# Altium PCB PCB_jaustry3.PcbDoc (part 1 of 2)
Units mm, origin at the board's own origin, x right, y up, seen from the top; angles counter-clockwise.
Board outline 112 x 68.3 mm, 9 copper layers (Top Layer (Sig 1), Ground Plane 1, Signal Layer 2, Power Plane 1, Power Plane 2, Signal Layer 3, Mid-Layer 3, Ground Plane 2, Bottom Layer (Sig 4)), stack 1.963 mm thick; 217 components, 291 nets, 863 pads, 308 vias.
Unrouted connection lines stored in the file: 371.
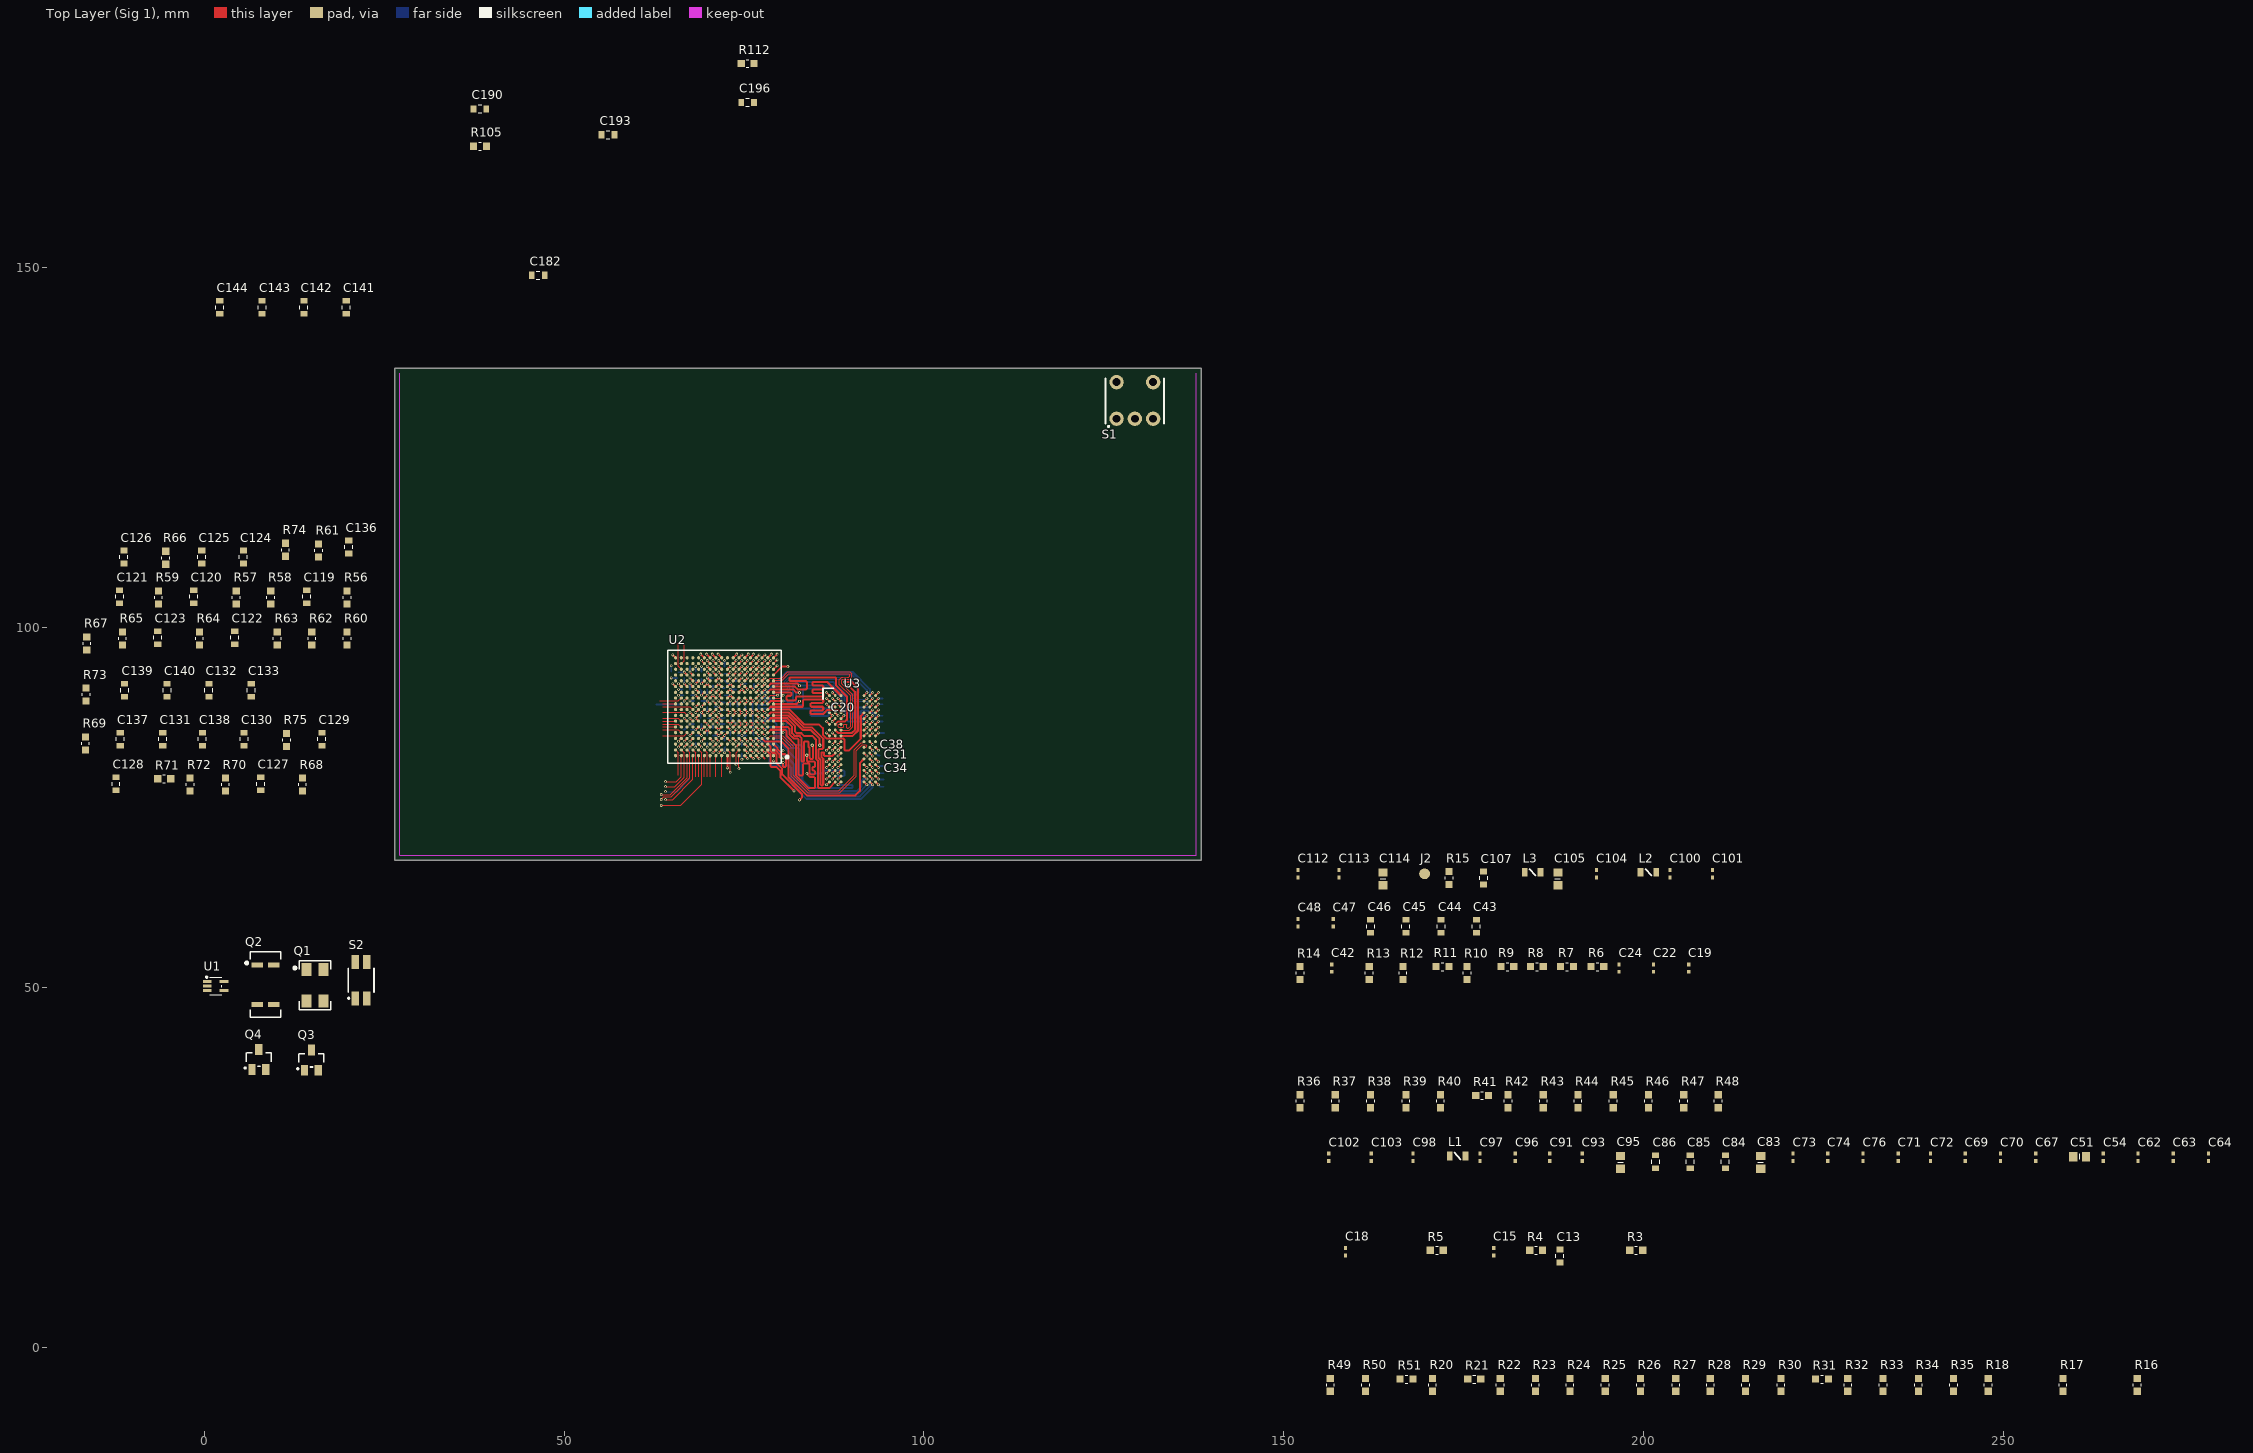
[diagram p0: Top Layer (Sig 1) view]
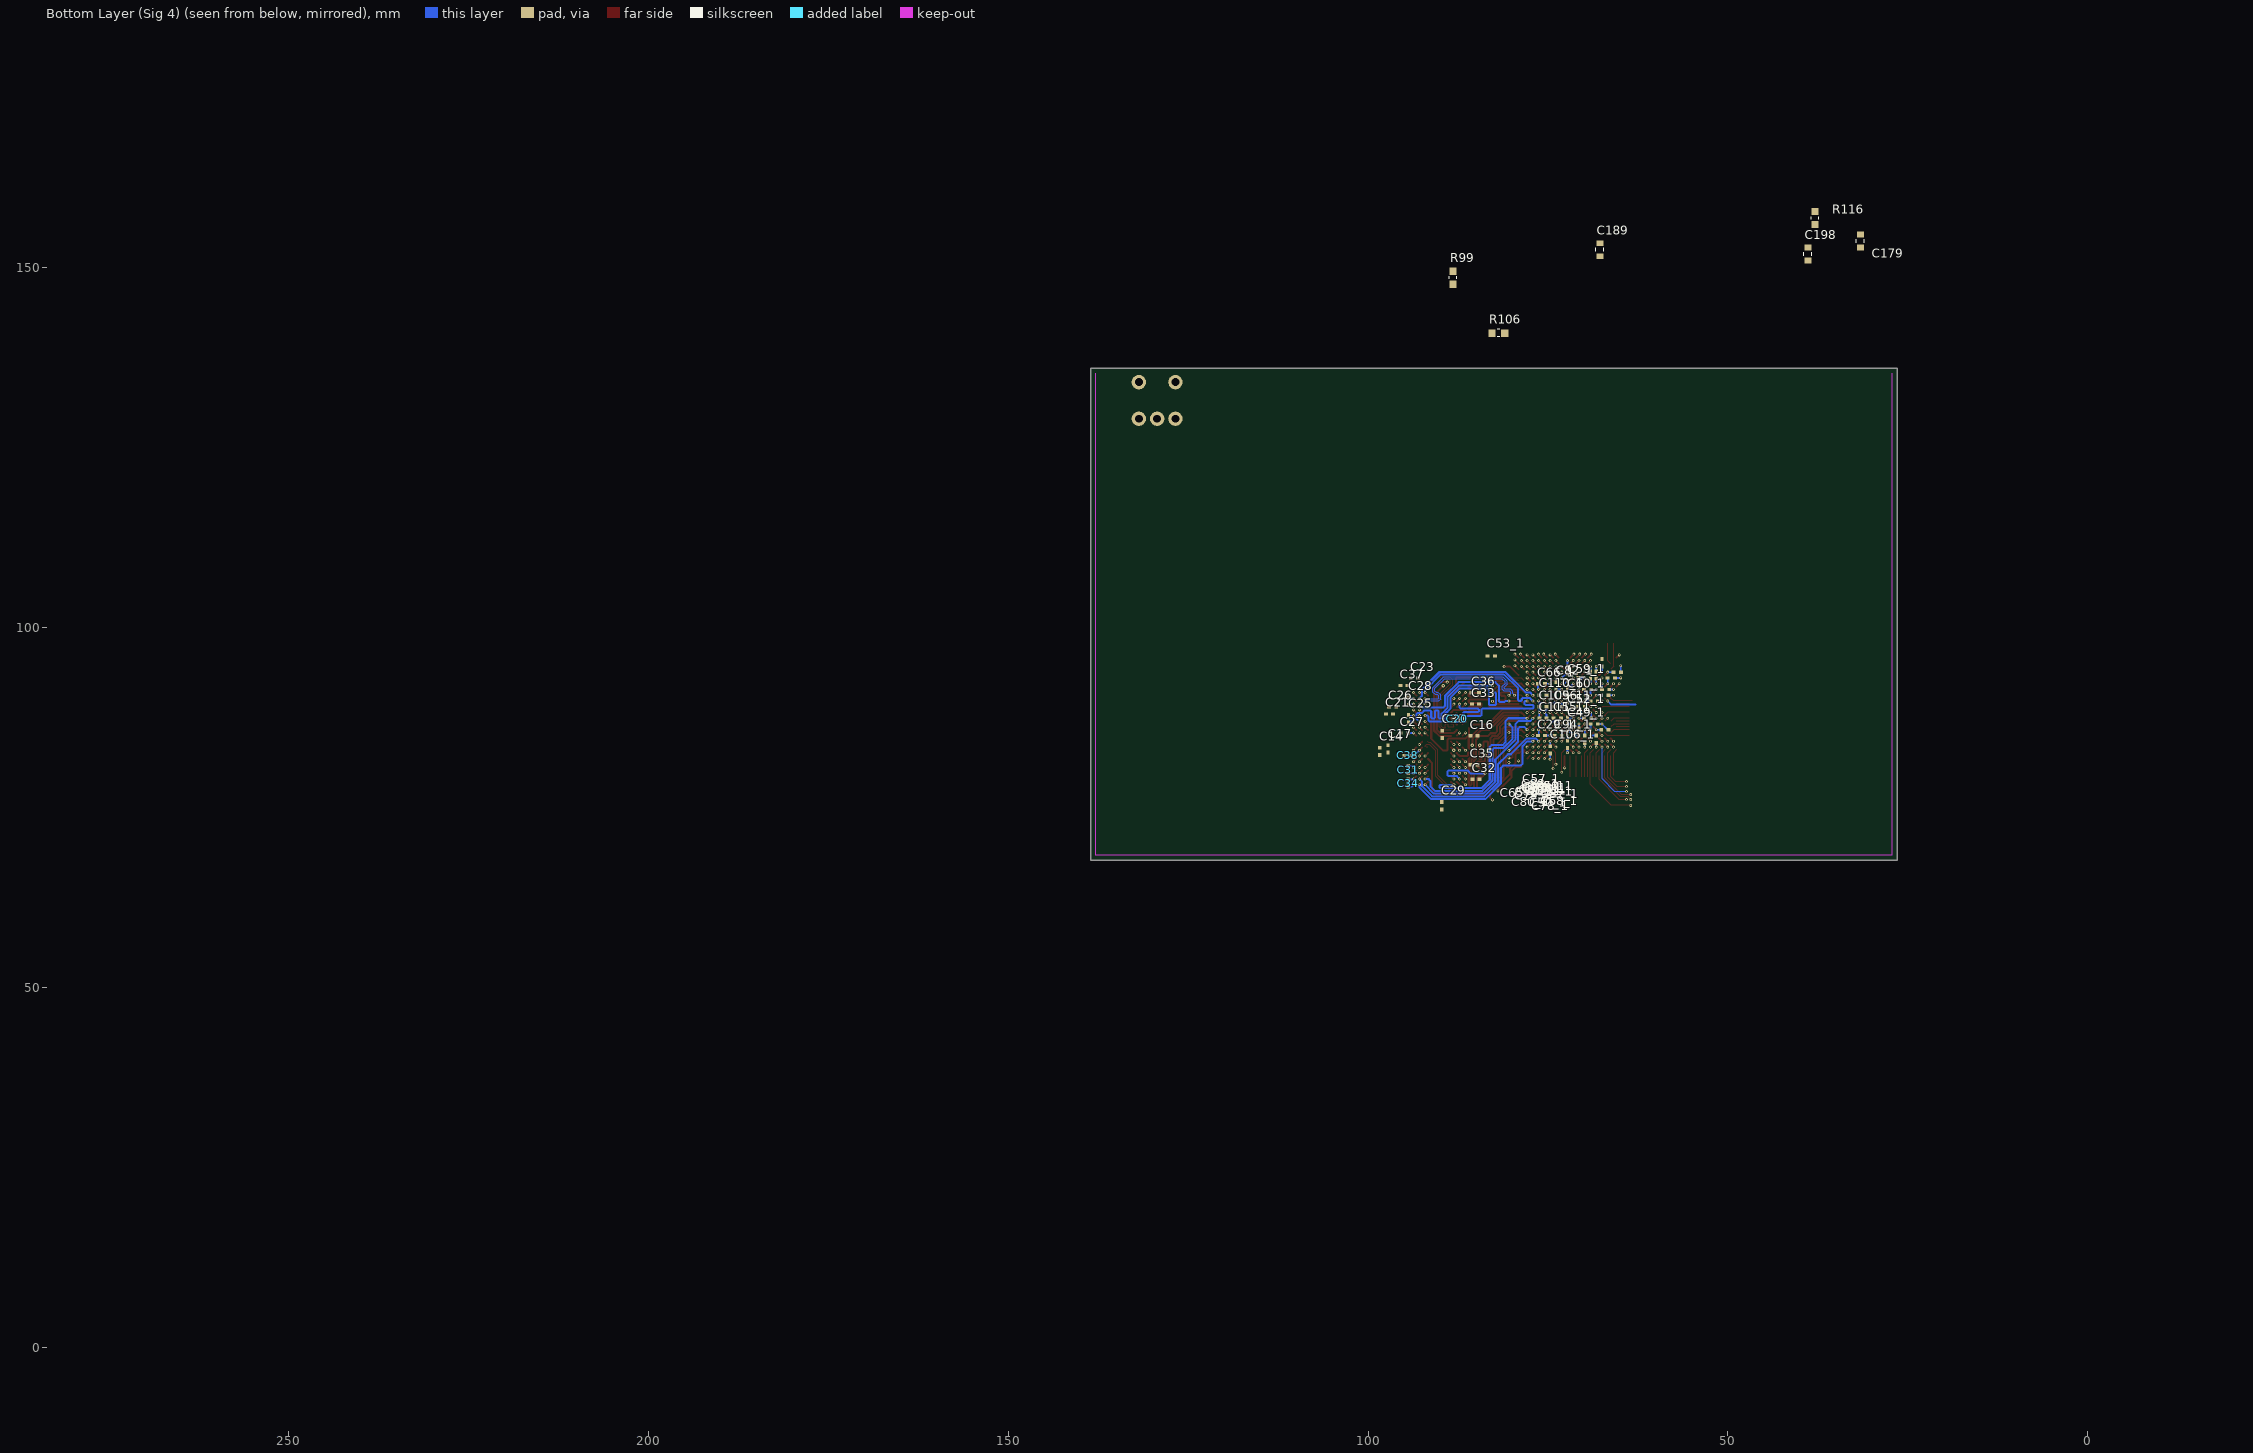
[diagram p1: Bottom Layer (Sig 4) view, seen from below]
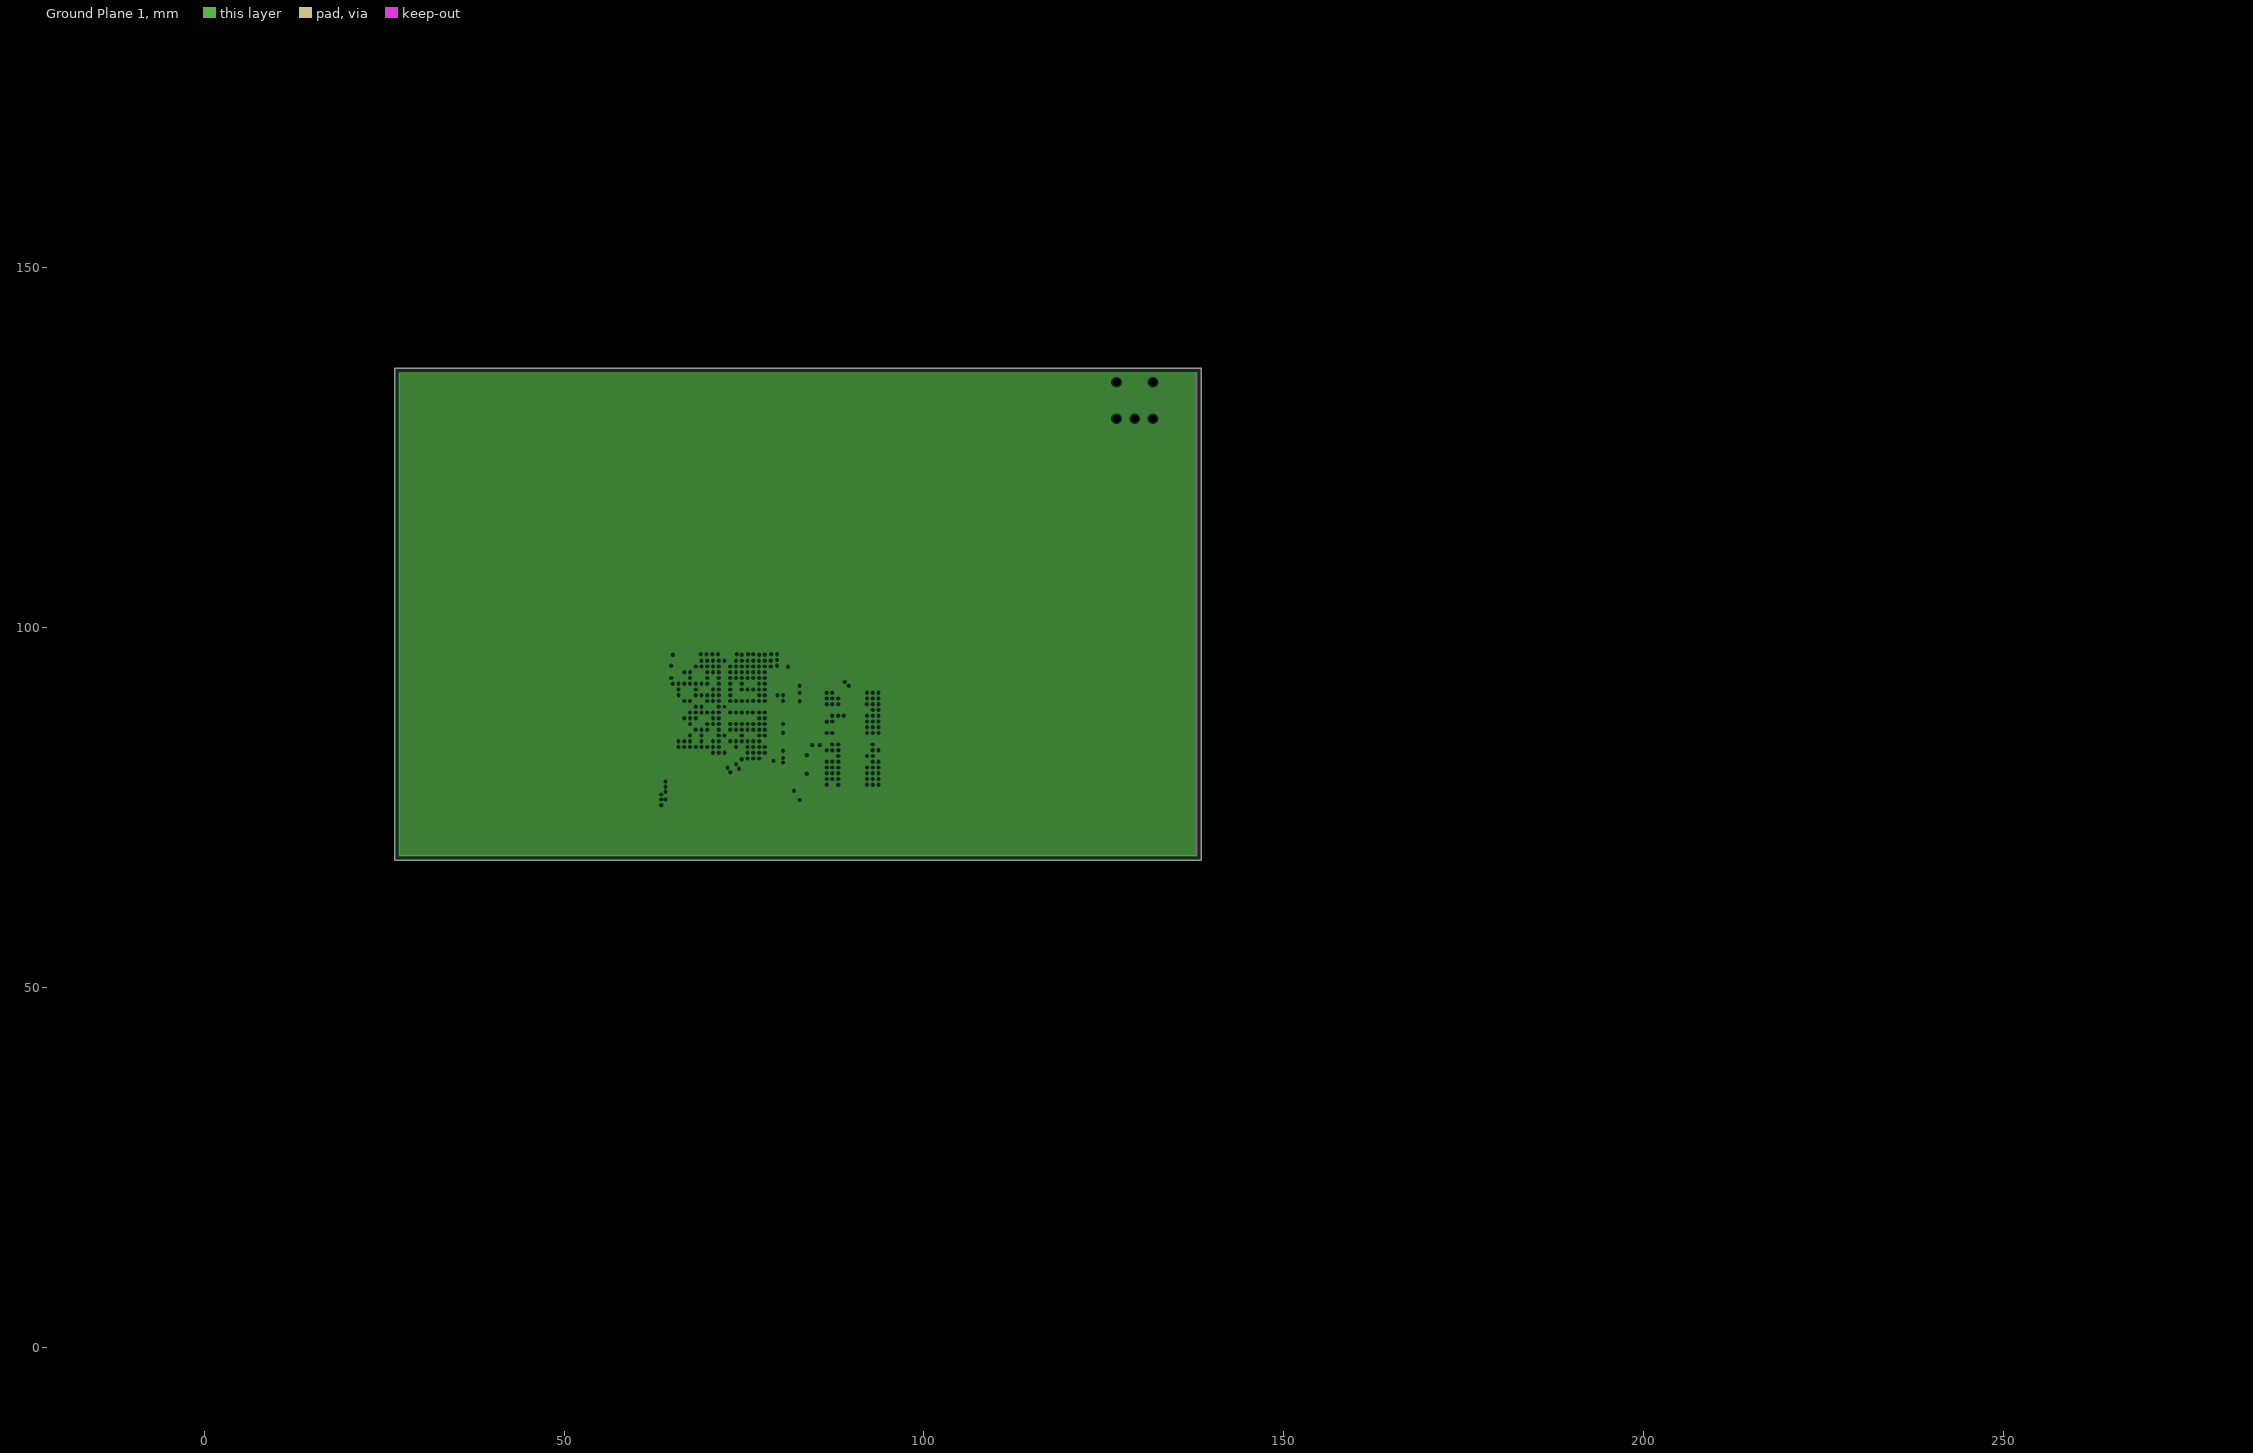
[diagram p2: Ground Plane 1, clearances drawn from the general rule]
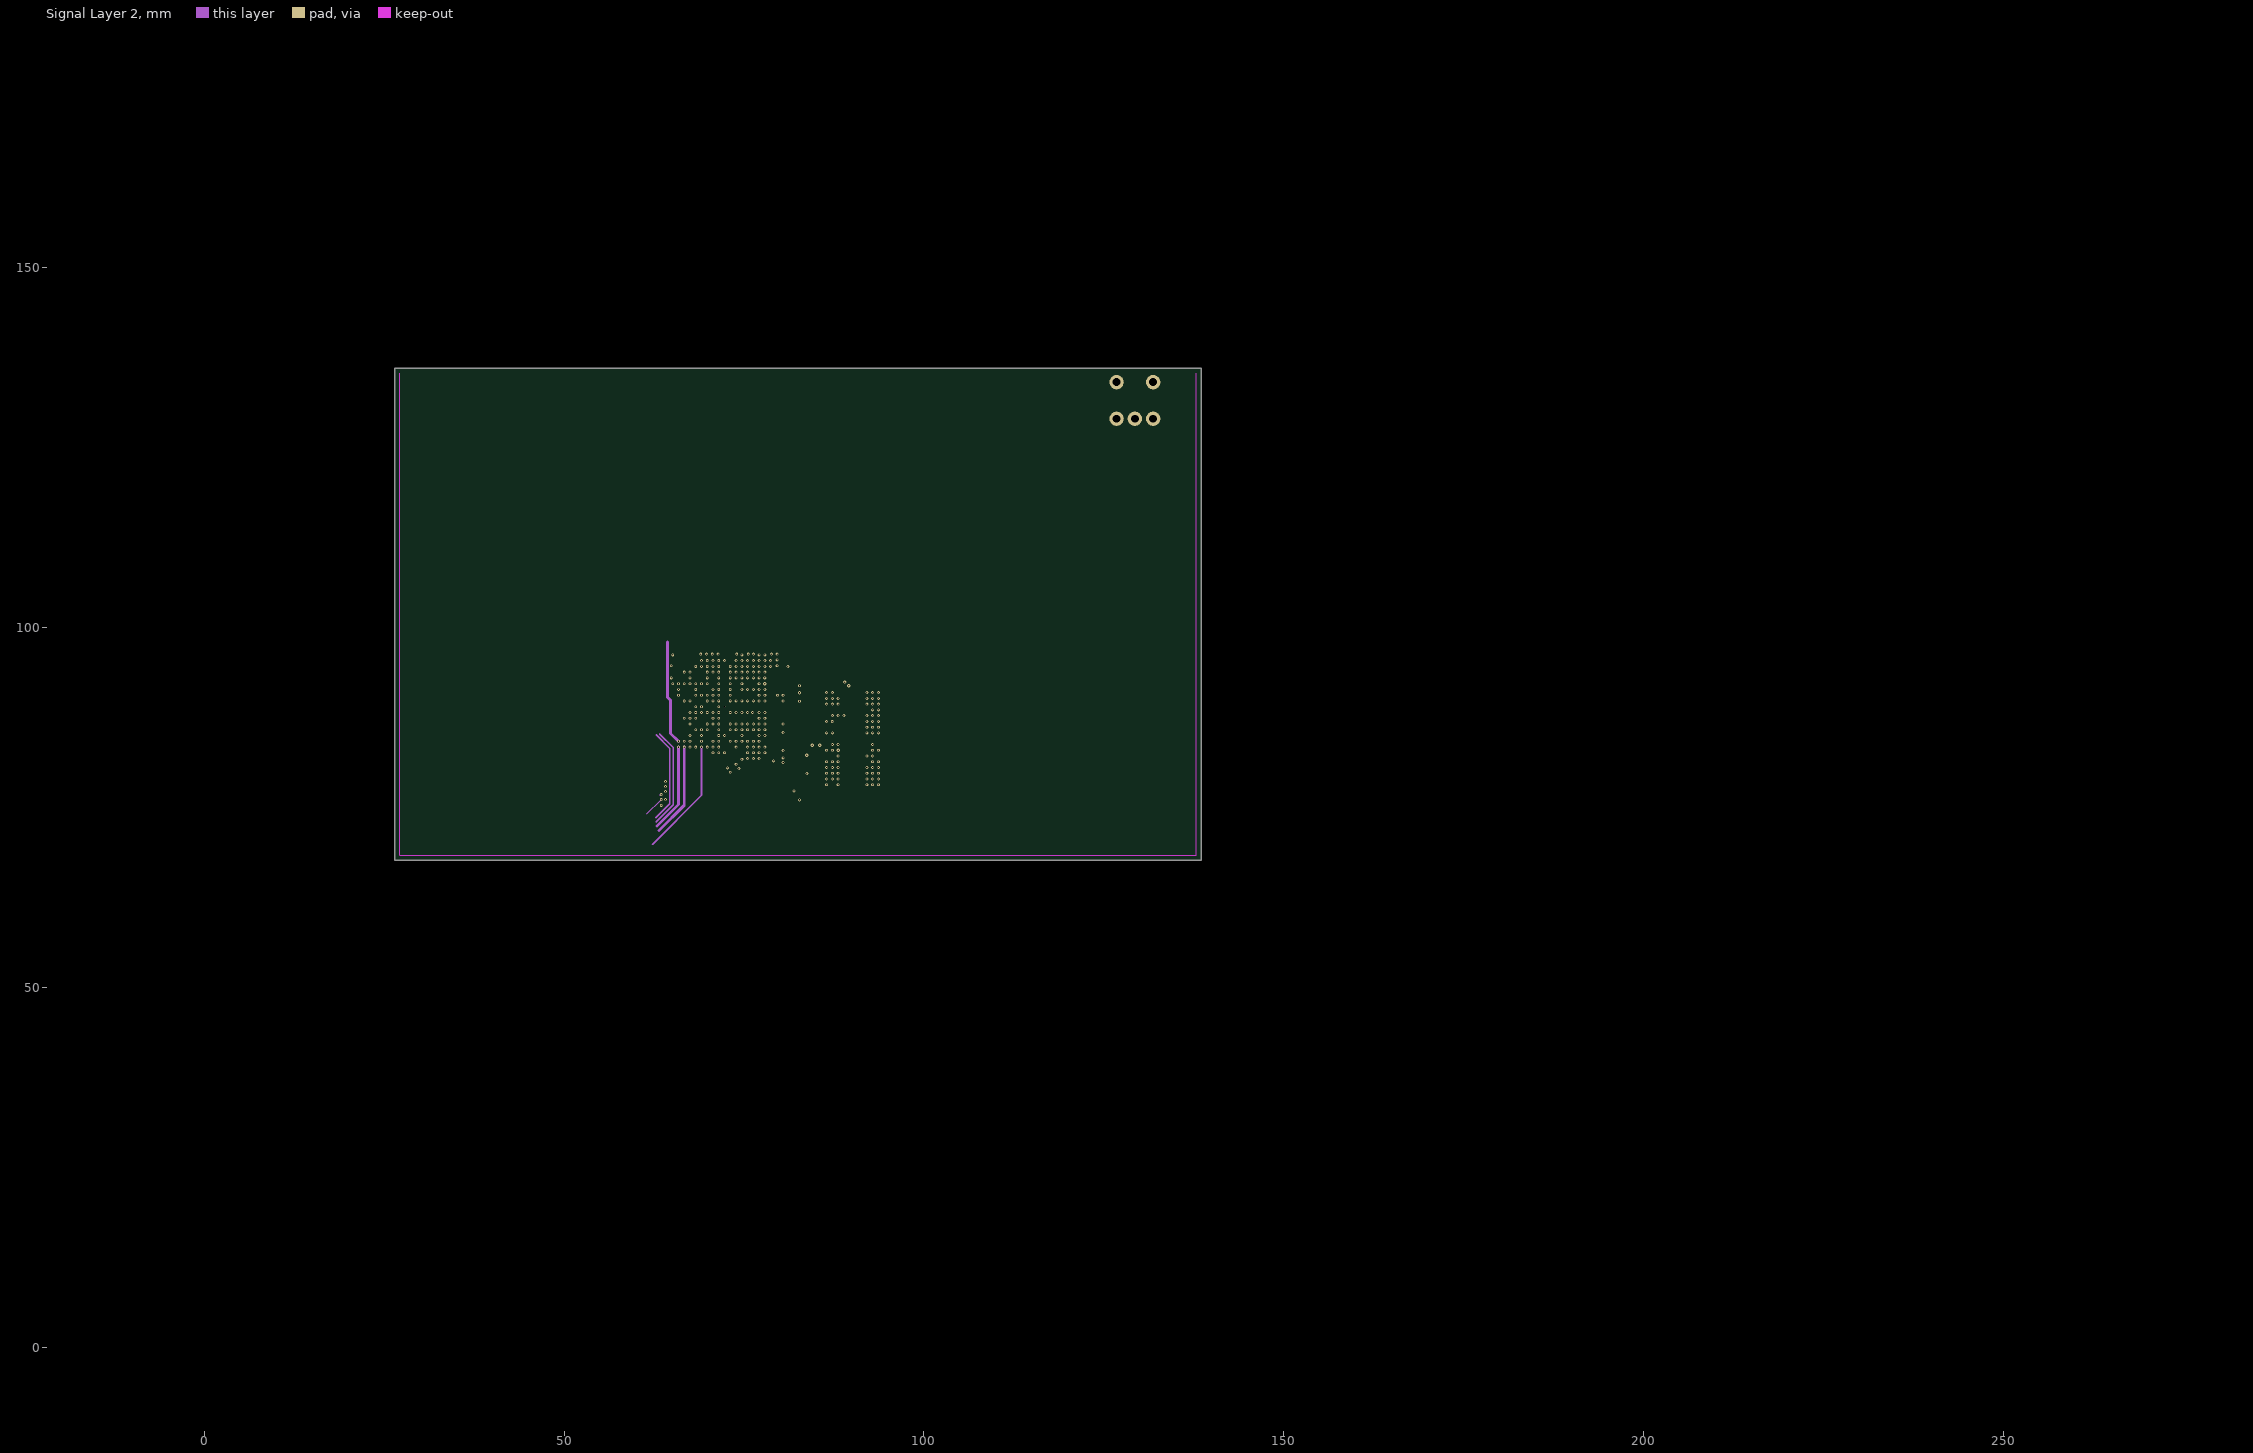
[diagram p3: Signal Layer 2]
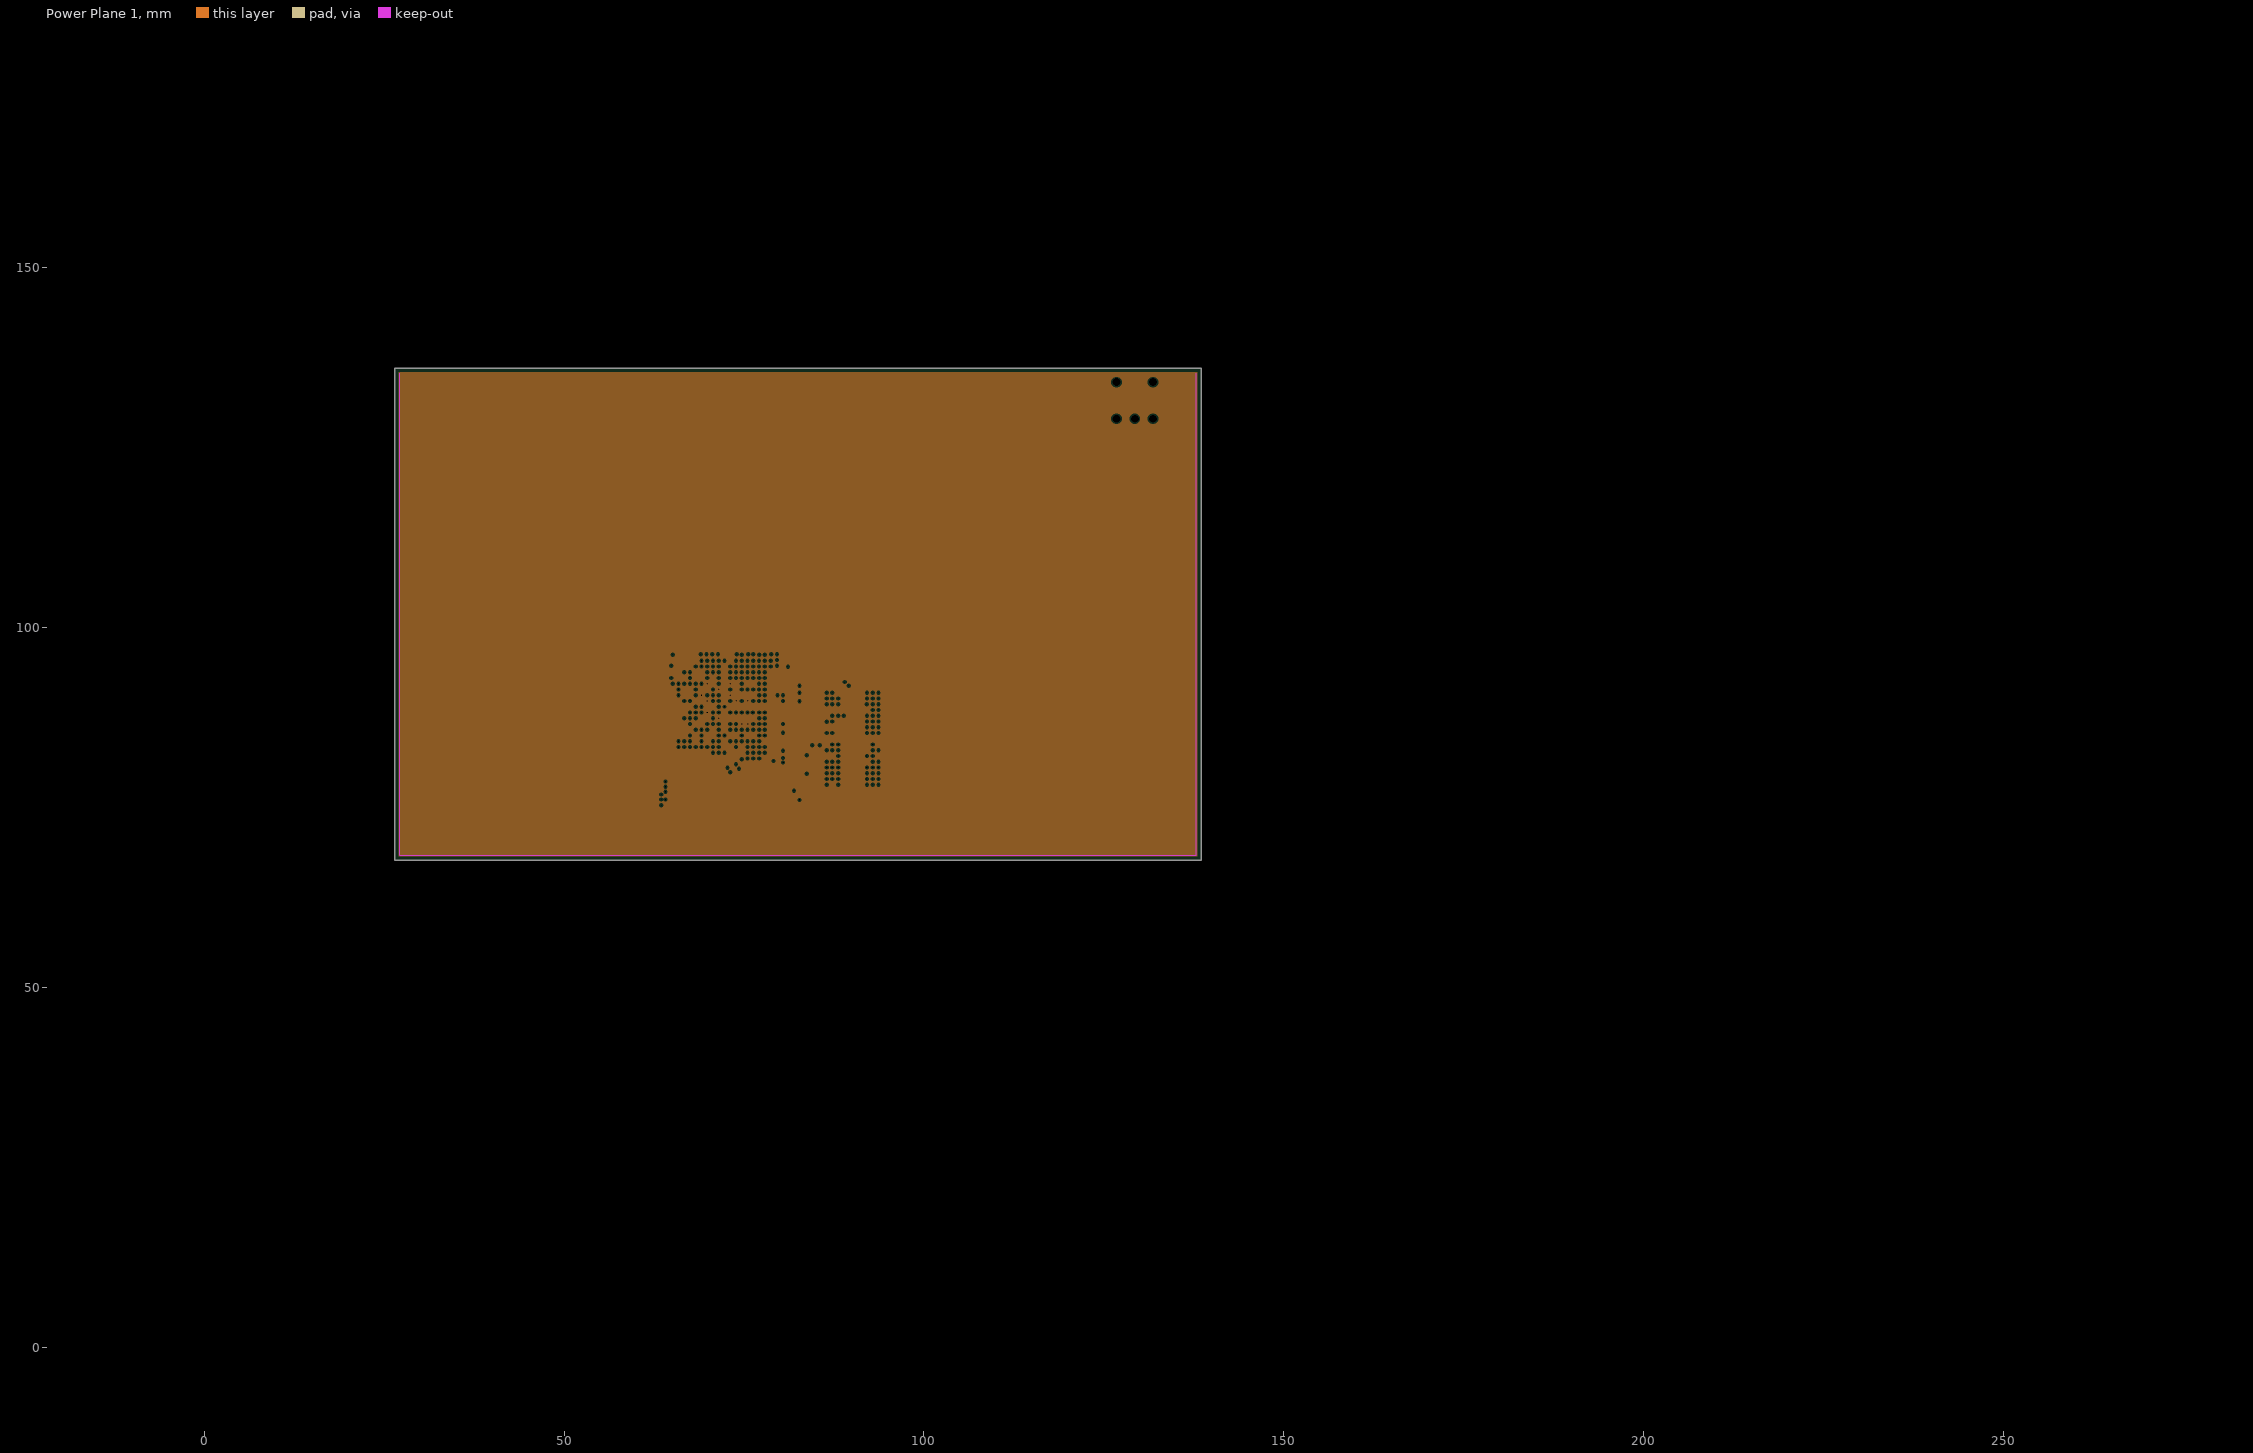
[diagram p4: Power Plane 1, clearances drawn from the general rule]
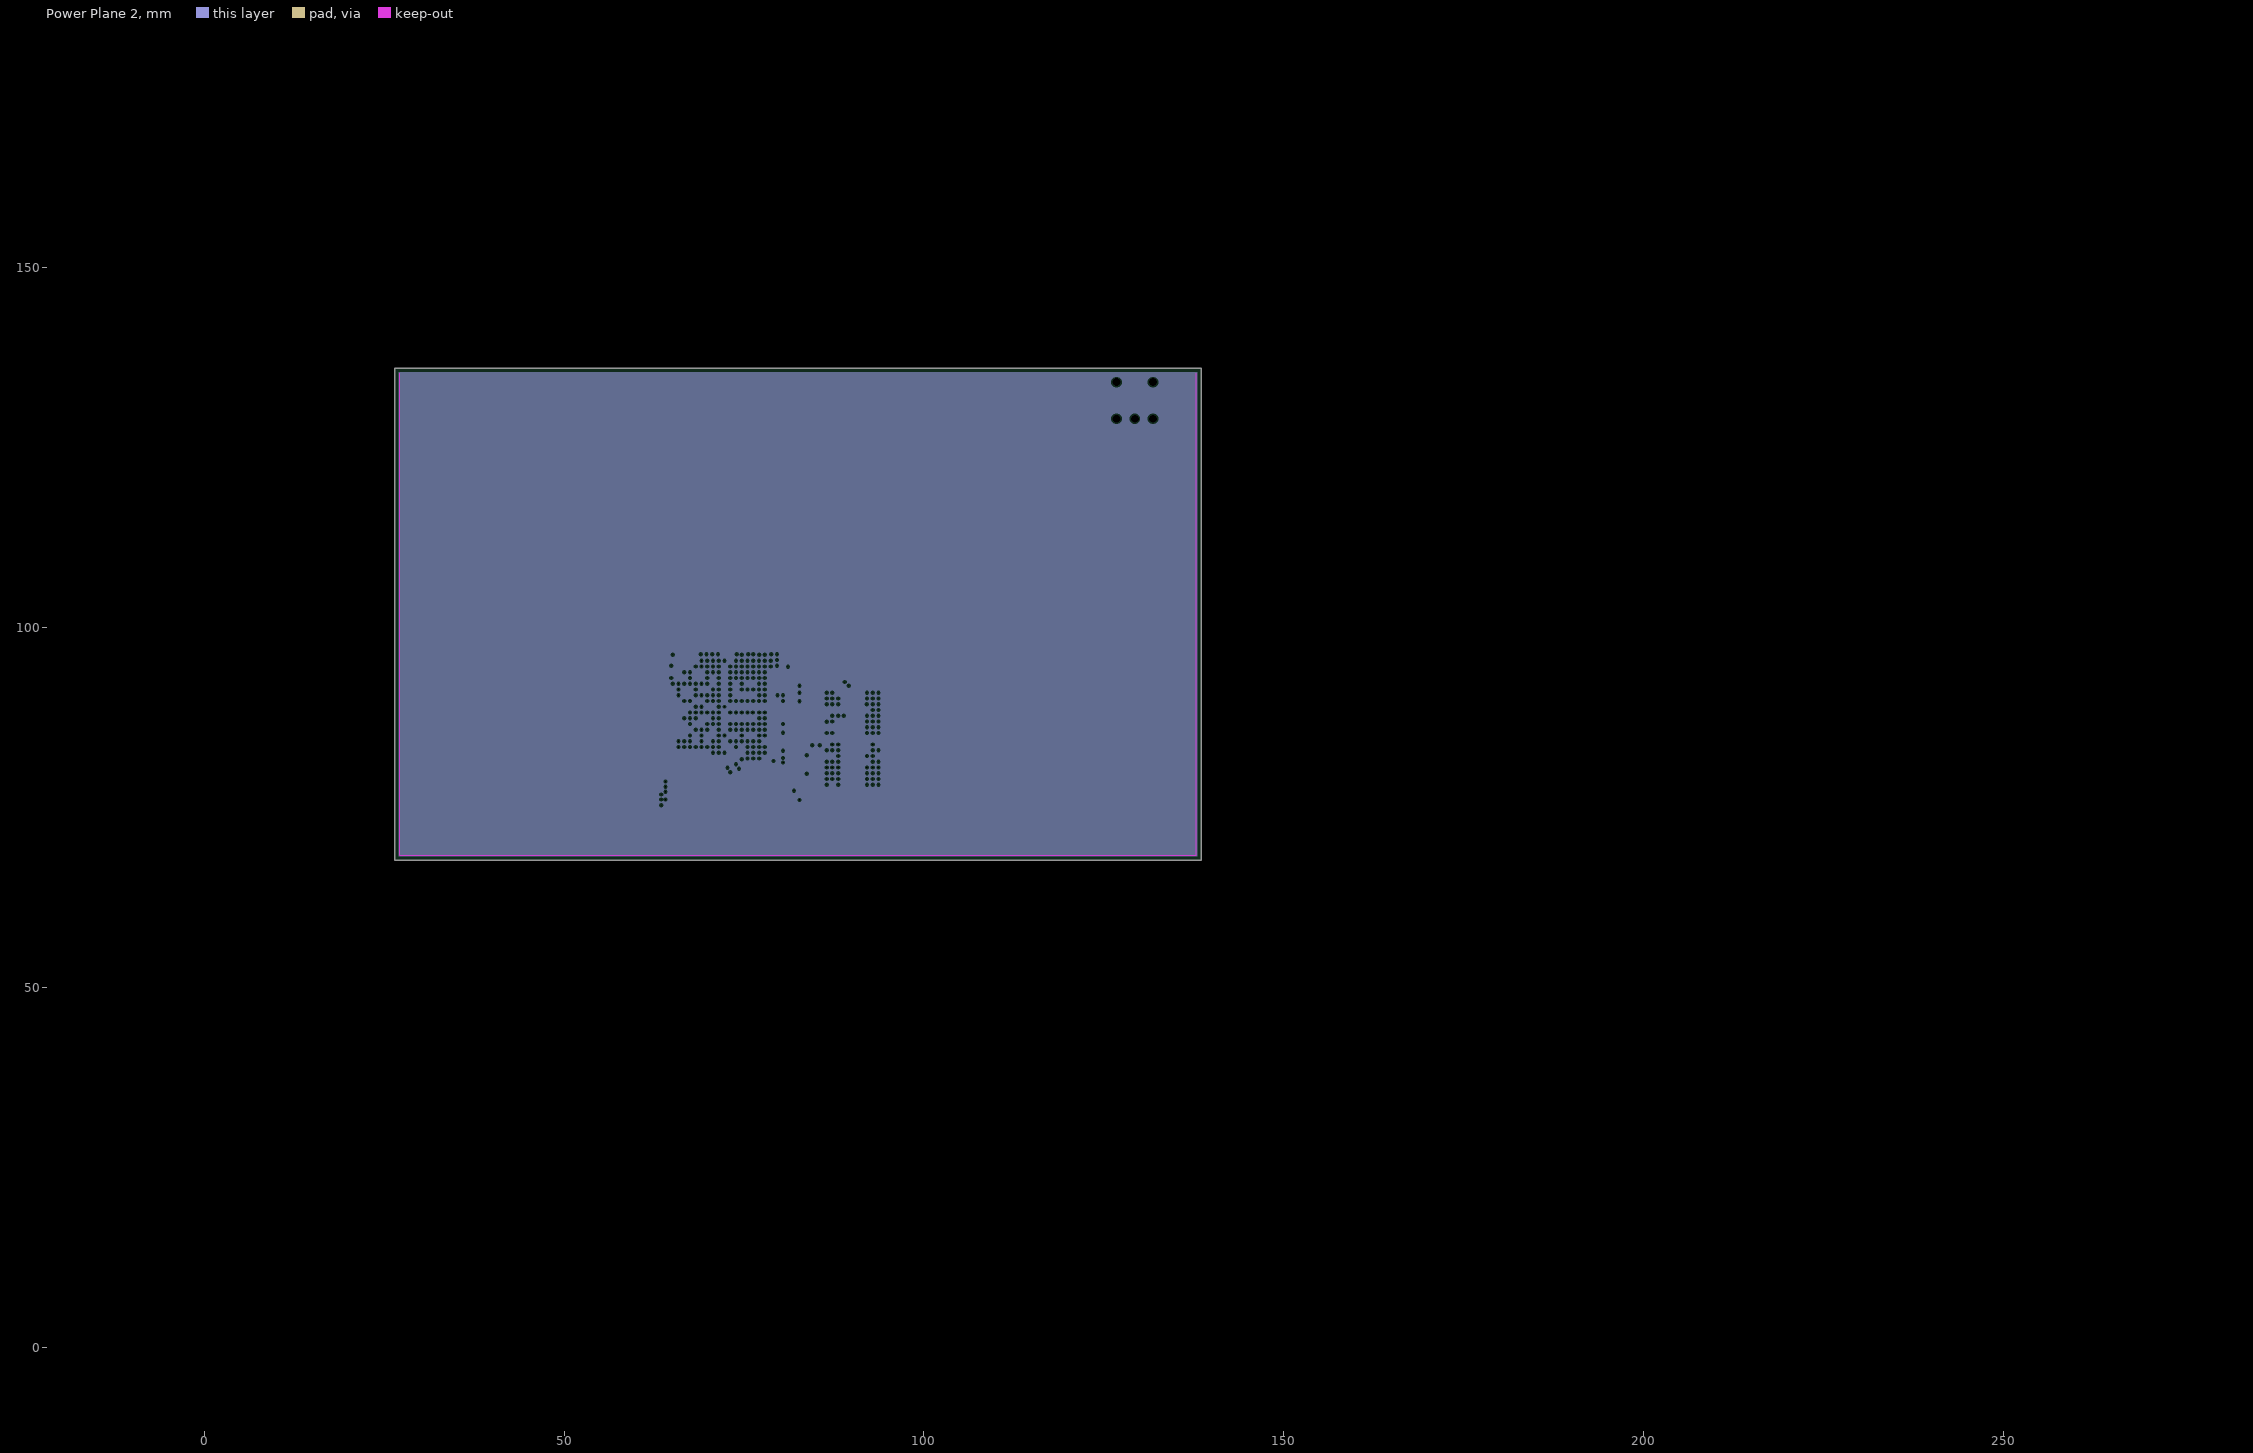
[diagram p5: Power Plane 2, clearances drawn from the general rule]
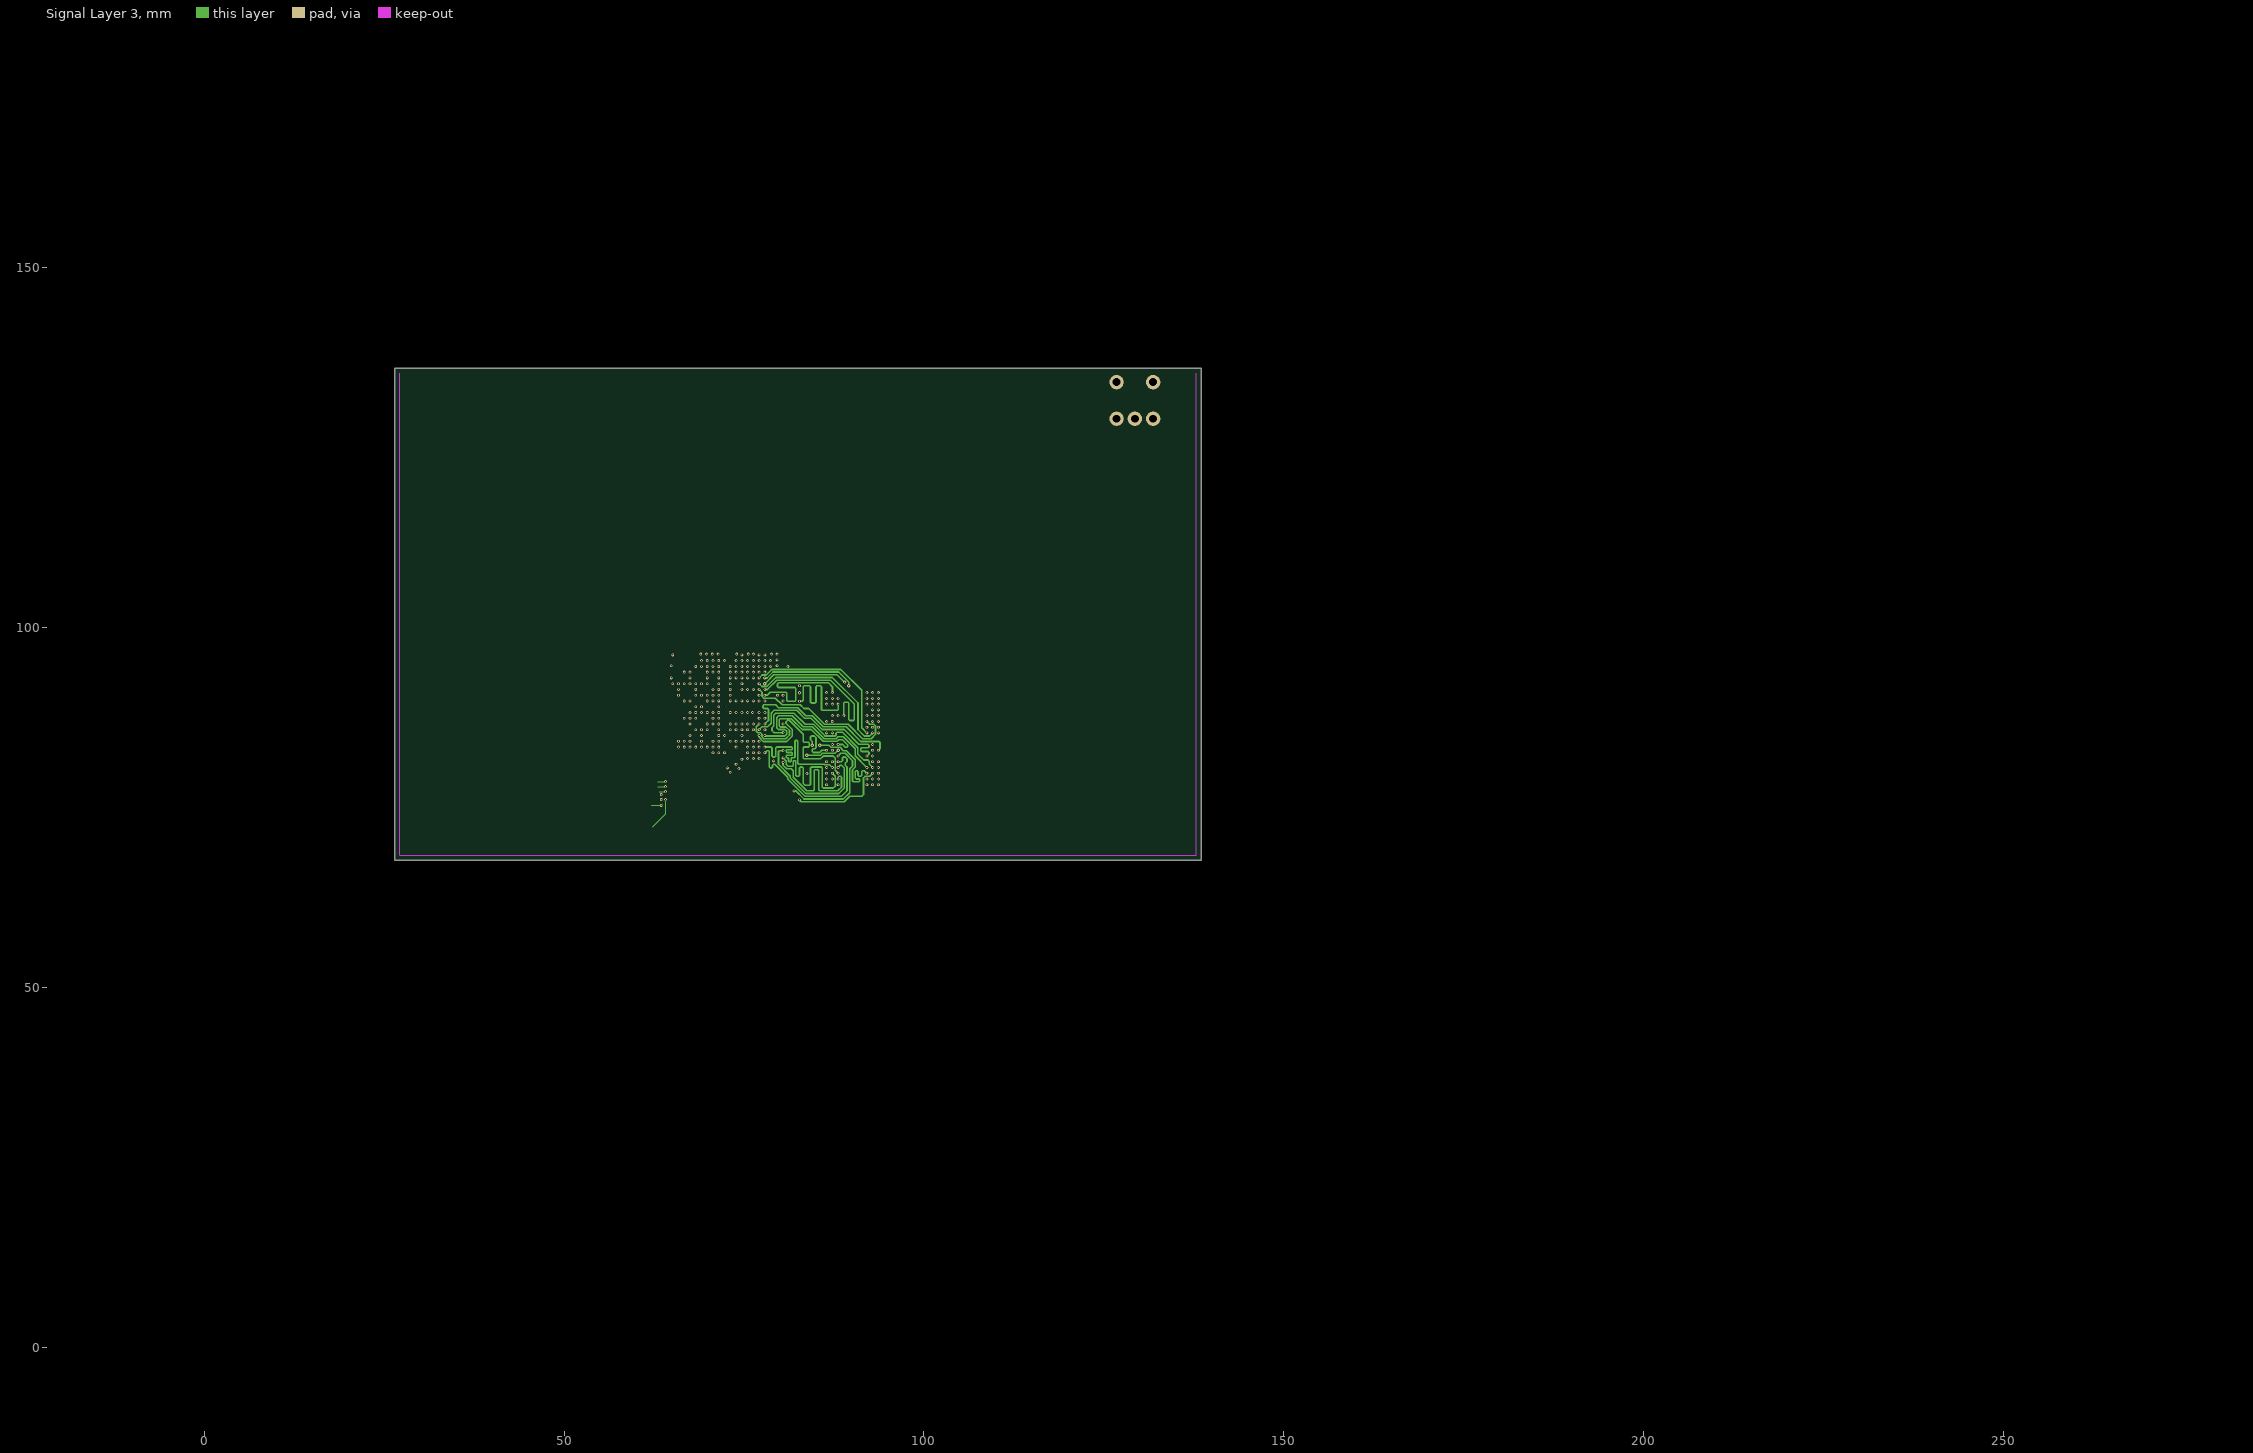
[diagram p6: Signal Layer 3]
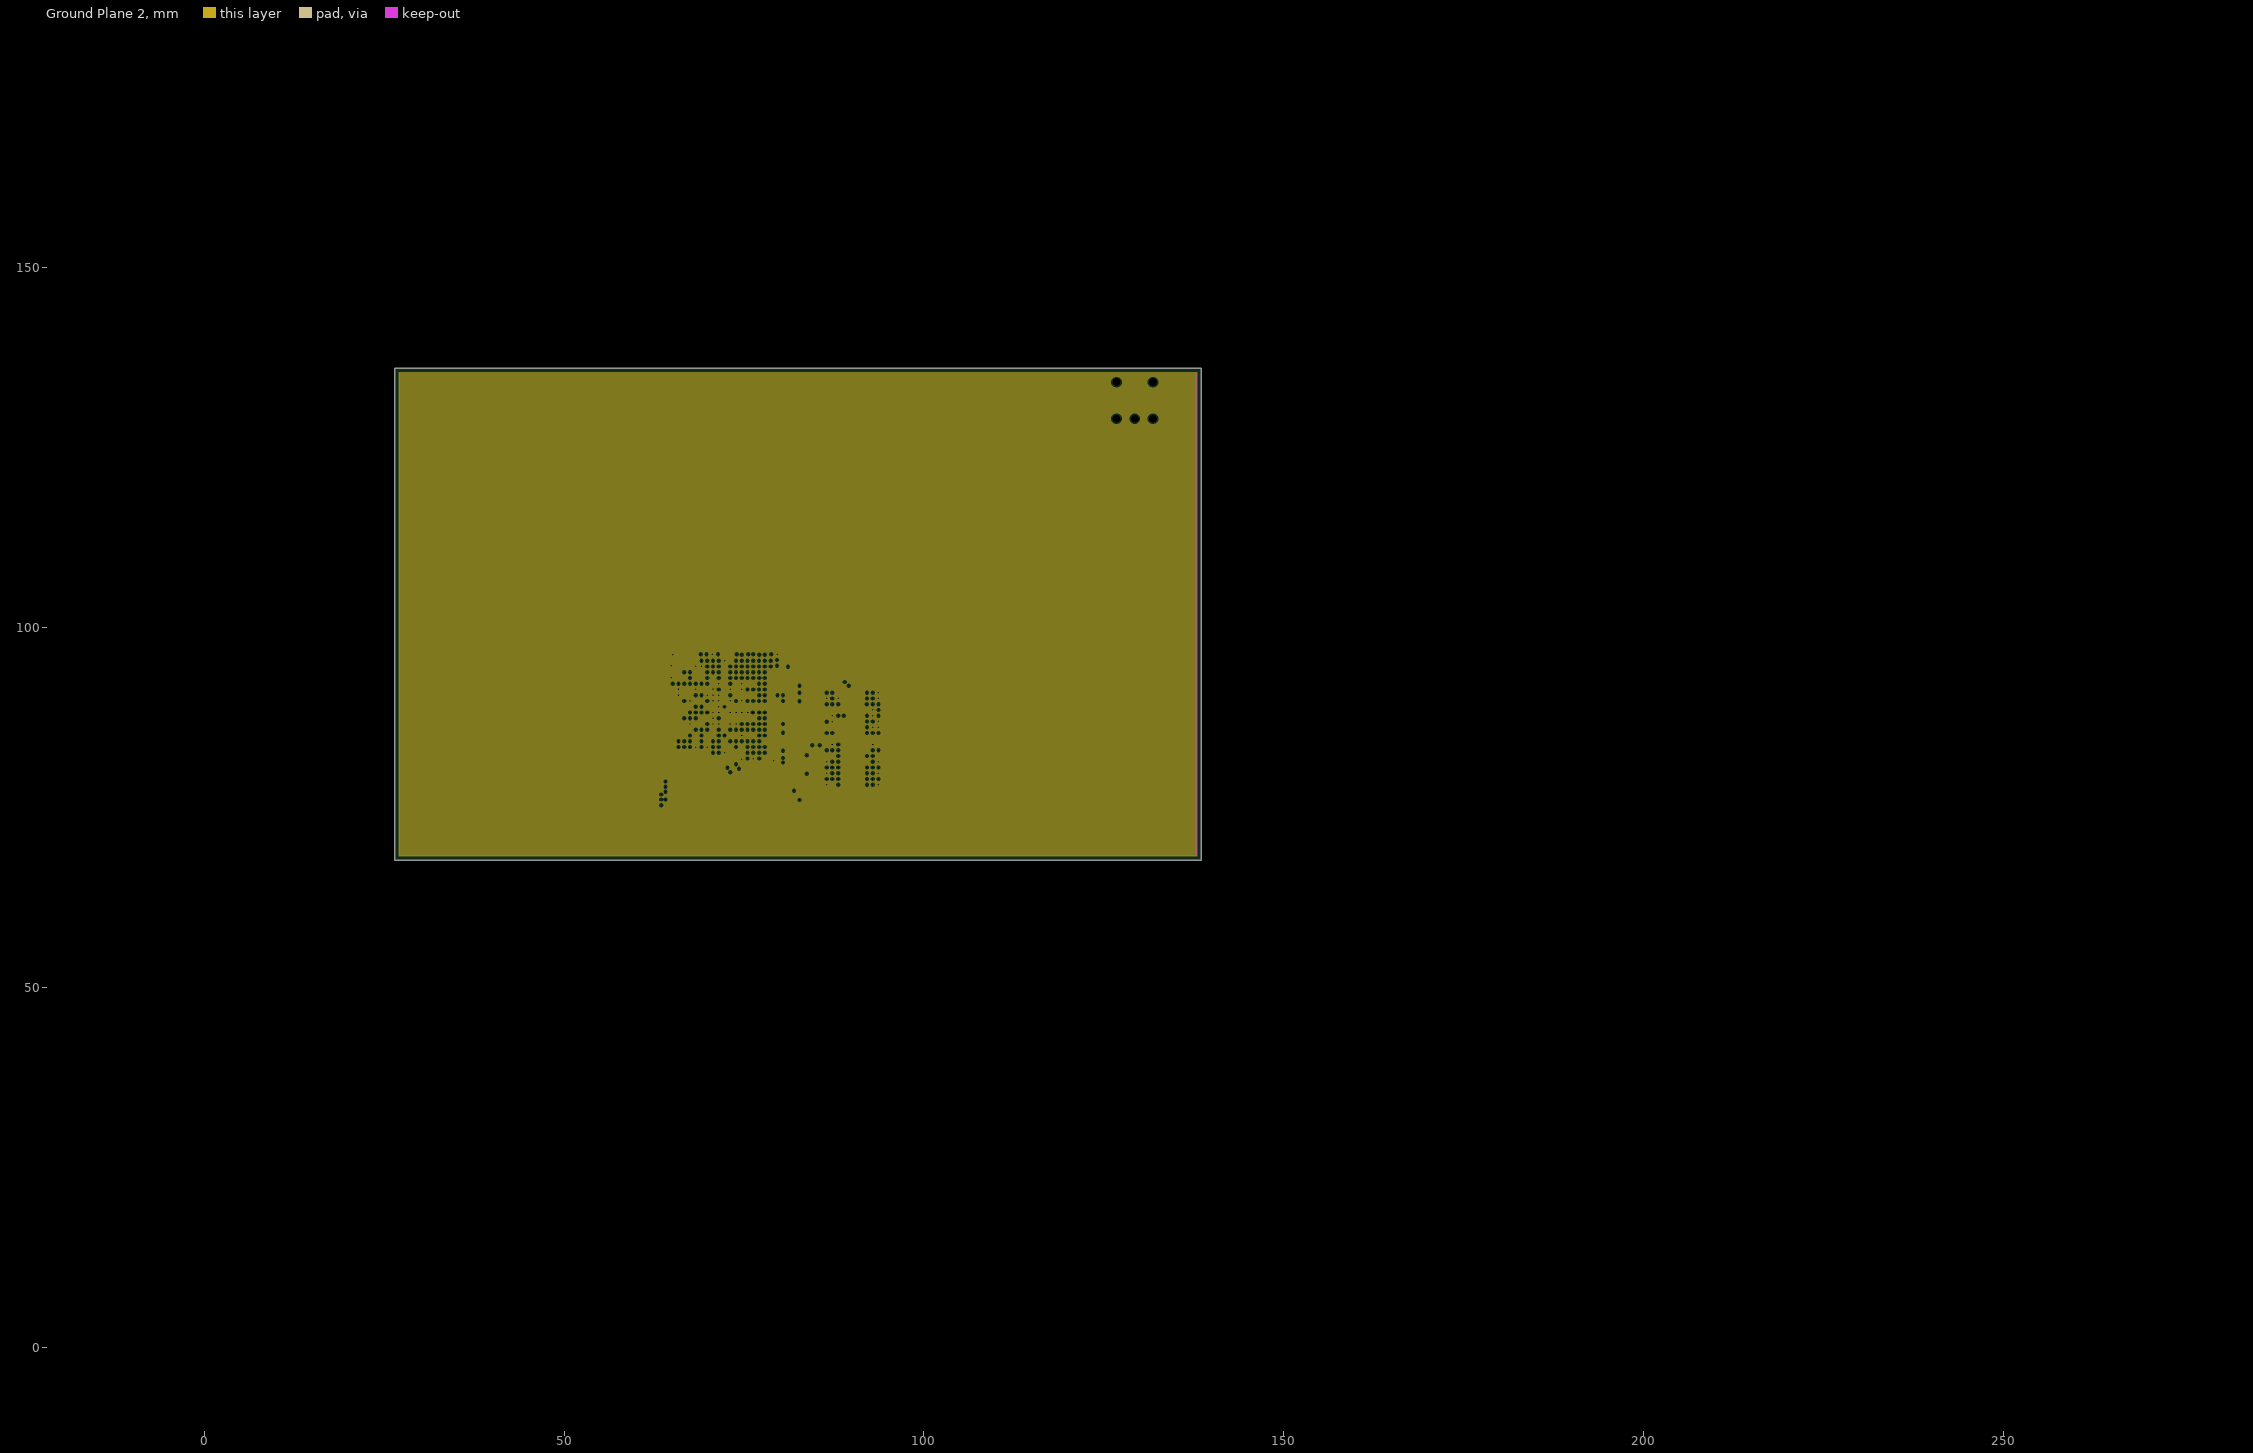
[diagram p7: Ground Plane 2, clearances drawn from the general rule]

## Layer stack, top to bottom
Top Solder: solder mask 0.0102, Solder Resist, Dk 3.7
Top Layer (Sig 1): signal copper 0.035
Dielectric 1: prepreg 0.2, FR-4, Dk 4.6
Ground Plane 1: plane copper 0.035, net AGND
Dielectric 2: core 0.2, FR-4, Dk 4.6
Signal Layer 2: signal copper 0.035
Dielectric 3: prepreg 0.2, FR-4, Dk 4.6
Power Plane 1: plane copper 0.035, net +1.1V_CORE
Dielectric 4: core 0.2, FR-4, Dk 4.6
Power Plane 2: plane copper 0.035, net +3.3VA
Dielectric 5: prepreg 0.2, FR-4, Dk 4.6
Signal Layer 3: signal copper 0.035
Dielectric 6: core 0.2, FR-4, Dk 4.6
Mid-Layer 3: signal copper 0.0356
Dielectric8: dielectric 0.32, FR-4, Dk 4.8
Ground Plane 2: plane copper 0.035, net GND
Dielectric 7: prepreg 0.127, FR-4, Dk 4.2
Bottom Layer (Sig 4): signal copper 0.035
Bottom Solder: solder mask 0.0102, Solder Resist, Dk 3.7

## Board outline
26.5,67.7 26.5,136 138.5,136 138.5,67.7

## Design rules (kind name [scope] priority, off if disabled: settings)
Clearance [All] p1: gap=0.1 ignorepadtopadclearanceinfootprint=FALSE except(0: Arc-Hole Track-Hole SMDPad-Hole THPad-Hole Via-Hole Fill-Hole Poly-Hole Region-Hole Text-Hole)
DiffPairsRouting DiffPair_DQSUDiffPairsRouting [InDifferentialPair ('ADQSU')] p1: maxlimit=0.254 minlimit=0.1 mostfreqgap=0.254 toplayer_maxgap=0.2 toplayer_prefgap=0.1 toplayer_minwidth=0.1 toplayer_maxwidth=0.226 toplayer_prefwidth=0.13 midlayer1_mingap=0 midlayer1_maxgap=0.2 midlayer1_prefgap=0.16 midlayer1_minwidth=0.149 midlayer1_maxwidth=0.149 midlayer1_prefwidth=0.149 midlayer2_mingap=0 midlayer2_maxgap=0.2 midlayer2_prefgap=0.16 midlayer2_minwidth=0.149 midlayer2_maxwidth=0.149 midlayer2_prefwidth=0.149 midlayer3_mingap=0.254 midlayer3_minwidth=0.381 midlayer3_maxwidth=0.381 midlayer3_prefwidth=0.381 bottomlayer_mingap=0 bottomlayer_maxgap=0.2 bottomlayer_prefgap=0.1 bottomlayer_minwidth=0.1 bottomlayer_maxwidth=0.226 bottomlayer_prefwidth=0.13 maxuncoupledlength=12.7
DiffPairsRouting DiffPair_DQSLDiffPairsRouting [InDifferentialPair ('ADQSL')] p2: maxlimit=0.254 minlimit=0.1 mostfreqgap=0.254 toplayer_maxgap=0.1 toplayer_prefgap=0.1 toplayer_minwidth=0.1 toplayer_maxwidth=0.13 toplayer_prefwidth=0.13 midlayer1_mingap=0.2 midlayer1_maxgap=0.2 midlayer1_prefgap=0.2 midlayer1_minwidth=0.149 midlayer1_maxwidth=0.149 midlayer1_prefwidth=0.149 midlayer2_mingap=0.2 midlayer2_maxgap=0.2 midlayer2_prefgap=0.2 midlayer2_minwidth=0.149 midlayer2_maxwidth=0.149 midlayer2_prefwidth=0.149 midlayer3_mingap=0.254 midlayer3_minwidth=0.381 midlayer3_maxwidth=0.381 midlayer3_prefwidth=0.381 bottomlayer_mingap=0.2 bottomlayer_maxgap=0.2 bottomlayer_prefgap=0.2 bottomlayer_minwidth=0.226 bottomlayer_maxwidth=0.226 bottomlayer_prefwidth=0.226 maxuncoupledlength=12.7
DiffPairsRouting DiffPair_CKDiffPairsRouting [InDifferentialPair ('ACK')] p3: maxlimit=0.254 minlimit=0.1 mostfreqgap=0.254 toplayer_maxgap=0.2 toplayer_prefgap=0.1 toplayer_minwidth=0.1 toplayer_maxwidth=0.226 toplayer_prefwidth=0.13 midlayer1_mingap=0.2 midlayer1_maxgap=0.2 midlayer1_prefgap=0.2 midlayer1_minwidth=0.149 midlayer1_maxwidth=0.149 midlayer1_prefwidth=0.149 midlayer2_mingap=0.2 midlayer2_maxgap=0.2 midlayer2_prefgap=0.2 midlayer2_minwidth=0.149 midlayer2_maxwidth=0.149 midlayer2_prefwidth=0.149 midlayer3_mingap=0.254 midlayer3_minwidth=0.381 midlayer3_maxwidth=0.381 midlayer3_prefwidth=0.381 bottomlayer_mingap=0.2 bottomlayer_maxgap=0.2 bottomlayer_prefgap=0.2 bottomlayer_minwidth=0.226 bottomlayer_maxwidth=0.226 bottomlayer_prefwidth=0.226 maxuncoupledlength=12.7
DiffPairsRouting DiffPair_DiffPairsRouting [InDifferentialPair ('SB')] p4: maxlimit=0.254 minlimit=0.254 mostfreqgap=0.254 toplayer_minwidth=0.381 toplayer_maxwidth=0.381 toplayer_prefwidth=0.381 midlayer1_minwidth=0.381 midlayer1_maxwidth=0.381 midlayer1_prefwidth=0.381 midlayer2_minwidth=0.381 midlayer2_maxwidth=0.381 midlayer2_prefwidth=0.381 midlayer3_minwidth=0.381 midlayer3_maxwidth=0.381 midlayer3_prefwidth=0.381 bottomlayer_minwidth=0.381 bottomlayer_maxwidth=0.381 bottomlayer_prefwidth=0.381 maxuncoupledlength=12.7
DiffPairsRouting DiffPair_90DiffPairsRouting [InDifferentialPair ('SB')] p5: maxlimit=0.2 minlimit=0.2 mostfreqgap=0.2 toplayer_minwidth=0.2 toplayer_maxwidth=0.2 toplayer_prefwidth=0.2 midlayer1_minwidth=0.2 midlayer1_maxwidth=0.2 midlayer1_prefwidth=0.2 midlayer2_minwidth=0.2 midlayer2_maxwidth=0.2 midlayer2_prefwidth=0.2 midlayer3_minwidth=0.2 midlayer3_maxwidth=0.2 midlayer3_prefwidth=0.2 bottomlayer_minwidth=0.2 bottomlayer_maxwidth=0.2 bottomlayer_prefwidth=0.2 maxuncoupledlength=12.7
DiffPairsRouting [All] p6: maxlimit=0.254 minlimit=0.254 mostfreqgap=0.254 toplayer_minwidth=0.381 toplayer_maxwidth=0.381 toplayer_prefwidth=0.381 midlayer1_minwidth=0.381 midlayer1_maxwidth=0.381 midlayer1_prefwidth=0.381 midlayer2_minwidth=0.381 midlayer2_maxwidth=0.381 midlayer2_prefwidth=0.381 midlayer3_minwidth=0.381 midlayer3_maxwidth=0.381 midlayer3_prefwidth=0.381 bottomlayer_minwidth=0.381 bottomlayer_maxwidth=0.381 bottomlayer_prefwidth=0.381 maxuncoupledlength=12.7
Height [All] p1: minheight=0 maxheight=50 prefheight=12.7
HoleSize [All] p1: absolutevalues=TRUE maxlimit=10 minlimit=0.2 maxpercent=80.000 minpercent=20.000
HoleToHoleClearance [All] p1: gap=0.25 allowstackedmicrovias=TRUE
MatchedLengths DiffPair_DQSUMatchedLengths [InDifferentialPair ('ADQSU')] p1: tolerance=0 checknetsindiffpair=FALSE checkdiffpairvsdiffpair=TRUE checkxsignals=TRUE checkothers=TRUE
MatchedLengths DiffPair_DQSLMatchedLengths [InDifferentialPair ('ADQSL')] p2: tolerance=0 checknetsindiffpair=TRUE checkdiffpairvsdiffpair=FALSE checkxsignals=FALSE checkothers=FALSE
MatchedLengths DiffPair_CKMatchedLengths [InDifferentialPair ('ACK')] p3: tolerance=0 checknetsindiffpair=TRUE checkdiffpairvsdiffpair=FALSE checkxsignals=FALSE checkothers=FALSE
MatchedLengths DiffPair_MatchedLengths [InDifferentialPair ('SB')] p4: tolerance=25.4 checknetsindiffpair=FALSE checkdiffpairvsdiffpair=TRUE checkxsignals=TRUE checkothers=TRUE
MatchedLengths DiffPair_90MatchedLengths [InDifferentialPair ('SB')] p5: tolerance=0.5 checknetsindiffpair=TRUE checkdiffpairvsdiffpair=FALSE checkxsignals=FALSE checkothers=FALSE
MinimumSolderMaskSliver [All] p1: minsoldermaskwidth=0.1
PlaneClearance [All] p1: clearance=0.2
PlaneConnect [All] p1: planeconnectstyle=Relief reliefexpansion=0.1 reliefentries=4 reliefconductorwidth=0.1 reliefairgap=0.1
PolygonConnect [All] p1: connectstyle=NoConnect reliefconductorwidth=0.1 reliefentries=4 polygonreliefangle="90 Angle" airgapwidth=0.2
RoutingCorners [All] p1: cornerstyle=45-Degree minsetback=2.5 maxsetback=2.5
RoutingVias [All] p1: holewidth=0.2 width=0.4 viastyle="Through Hole" minholewidth=0.2 minwidth=0.4 maxholewidth=10 maxwidth=11
ShortCircuit "GND-AGND Connection" [InNet('GND') vs InNet('AGND')] p1: allowed=TRUE
SilkToSilkClearance SilkToSilkClearance_1 [OnLayer('Top Overlay') vs OnLayer('Top Overlay')] p1: silktosilkclearance=0
SilkToSilkClearance [All] p2: silktosilkclearance=0
SilkToSolderMaskClearance [IsPad] p1: minsilkscreentomaskgap=0.15 clearancetoexposedcopper=TRUE
SolderMaskExpansion [All] p1: expansion=0.05
Width [All] p1: maxlimit=10 minlimit=0.1 preferedwidth=0.15
19 further rules are at their usual default settings.

## Classes and differential pairs
component class "Audio OUT": "U20_Audio OUT"
component class "Audio IN": C179 C182 C189 C190 C193 C196 C198 R99 R105 R106 R112 R116 "U20_Audio IN"
component class "Codec Audio": C119 C120 C121 C122 C123 C124 C125 C126 C127 C128 C129 C130 C131 C132 C133 C136 C137 C138 C139 C140 C141 C142 C143 C144 R56 R57 R58 R59 R60 R61 R62 R63 R64 R65 R66 R67 R68 R69 R70 R71 R72 R73 R74 R75
component class LCD: Q3 Q4 R16 R17 R18 R20 R21 R22 R23 R24 R25 R26 R27 R28 R29 R30 R31 R32 R33 R34 R35 R36 R37 R38 R39 R40 R41 R42 R43 R44 R45 R46 R47 R48 R49 R50 R51
component class "Part A": C13 C15 C18 C19 C22 C24 C42 Q1 Q2 R3 R4 R5 R6 R7 R8 R9 R10 R11 R12 R13 R14 R321 R322 R323 S2 U1 U2
component class "Part B": C43 C44 C45 C46 C47 C48
component class "Part C (Alim)": C51 C54 C62 C63 C64 C67 C69 C70 C71 C72 C73 C74 C76 C83 C84 C85 C86 C91 C93 C95 C96 C97 C98 C100 C101 C102 C103 C104 C105 C107 C112 C113 C114 J2 L1 L2 L3 R15
net class LCD_B[0..7]: LCD_B0 LCD_B1 LCD_B2 LCD_B3 LCD_B4 LCD_B5 LCD_B6 LCD_B7
net class LCD_G[0..7]: LCD_G0 LCD_G1 LCD_G2 LCD_G3 LCD_G4 LCD_G5 LCD_G6 LCD_G7
net class LCD_R[0..7]: LCD_R0 LCD_R1 LCD_R2 LCD_R3 LCD_R4 LCD_R5 LCD_R6 LCD_R7
component class Alimentation: S1
net class SBS: SB_N SB_P
net class bonjour: ADQSL_N ADQSL_P
net class CLOCK: ACK_N ACK_P
net class connard: ADQSU_N ADQSU_P
differential pair SB: +SB_P -SB_N
differential pair ACK: +ACK_P -ACK_N
differential pair ADQSL: +ADQSL_P -ADQSL_N
differential pair ADQSU: +ADQSU_P -ADQSU_N

## Components (designator, comment, footprint, x,y, rotation, side; value= is the part's Value field where it differs from the comment)
C13 "1uF" CAPC1608X08 188.356,12.691 r90 top
C14 "100nF" "CAPC1005X05 (0402)"#1 98.39,82.792 r270 top value=100pF
C15 "18pF" "CAPC1005X05 (0402)"#2 179.156,13.291 r90 top
C16 "100nF" "CAPC1005X05 (0402)"#1 85.28,84.955 r180 top value=100pF
C17 "100nF" "CAPC1005X05 (0402)"#1 97.246,83.139 r90 top value=100pF
C18 "18pF" "CAPC1005X05 (0402)"#2 158.557,13.291 r90 top
C19 "12pF" "CAPC1005X05 (0402)"#2 206.257,52.691 r90 top
C20 "100nF" "CAPC1005X05 (0402)"#2 87.631,87.332 r0 bottom value=100pF
C21 "100nF" "CAPC1005X05 (0402)"#1 97.022,88.004 r180 top value=100pF
C22 "12pF" "CAPC1005X05 (0402)"#2 201.357,52.691 r90 top
C23 "100nF" "CAPC1005X05 (0402)"#1 93.565,93.009 r180 top value=100pF
C24 "100nF" "CAPC1005X05 (0402)"#2 196.557,52.691 r90 top value=100pF
C25 "100nF" "CAPC1005X05 (0402)"#1 94.367,87.331 r90 top value=100pF
C26 "100nF" "CAPC1005X05 (0402)"#1 96.596,89.012 r180 top value=100pF
C27 "100nF" "CAPC1005X05 (0402)"#1 94.974,85.352 r180 top value=100pF
C28 "100nF" "CAPC1005X05 (0402)"#1 94.386,89.755 r270 top value=100pF
C29 "100nF" "CAPC1005X05 (0402)"#1 89.765,75.225 r270 top value=100pF
C29_1 "100nF" "CAPC1005X05 (0402)"#2 75.9,85 r0 bottom
C30 "100nF" "CAPC1005X05 (0402)"#1 89.68,85.155 r270 top value=100pF
C31 "100nF" "CAPC1005X05 (0402)"#2 94.432,80.264 r90 bottom value=100pF
C32 "100nF" "CAPC1005X05 (0402)"#1 85.011,78.926 r0 top value=100pF
C33 "100nF" "CAPC1005X05 (0402)"#1 85.074,89.363 r0 top value=100pF
C34 "100nF" "CAPC1005X05 (0402)"#2 94.432,78.398 r90 bottom value=100pF
C35 "100nF" "CAPC1005X05 (0402)"#1 85.28,80.955 r0 top value=100pF
C36 "100nF" "CAPC1005X05 (0402)"#1 85.104,90.939 r0 top value=100pF
C37 "100nF" "CAPC1005X05 (0402)"#1 95.004,91.945 r180 top value=100pF
C38 "100nF" "CAPC1005X05 (0402)"#2 94.464,82.237 r180 bottom value=100pF
C42 "100nF" "CAPC1005X05 (0402)"#2 156.657,52.691 r90 top value=100pF
C43 "1nF" CAPC1608X08 176.757,58.491 r90 top
C44 "1nF" CAPC1608X08 171.857,58.491 r90 top
C45 "1nF" CAPC1608X08 166.957,58.491 r90 top
C46 "1nF" CAPC1608X08 162.057,58.491 r90 top
C47 "10nF" "CAPC1005X05 (0402)"#2 156.857,58.991 r90 top value=10nf
C48 "100nF" "CAPC1005X05 (0402)"#2 151.957,58.991 r90 top value=100pF
C49_1 "100nF" "CAPC1005X05 (0402)"#2 72.3,86.1 r270 bottom
C50_1 "100nF" "CAPC1005X05 (0402)"#2 70.7,85.5 r270 bottom
C51 "22uF/6.3V" "0805 (2012 metric)" 260.556,26.491 r0 top value=22uF
C52_1 "100nF" "CAPC1005X05 (0402)"#2 72.3,88 r270 bottom
C53_1 "100nF" "CAPC1005X05 (0402)"#2 82.894,96.041 r180 bottom
C54 "100nF" "CAPC1005X05 (0402)"#2 263.856,26.391 r90 top value=100pF
C55_1 "100nF" "CAPC1005X05 (0402)"#2 73.7,87.4 r0 bottom
C56_1 "100nF" "CAPC1005X05 (0402)"#2 73.608,89 r0 bottom
C57_1 "100nF" "CAPC1005X05 (0402)"#2 70.4,89 r180 bottom
C58_1 "100nF" "CAPC1005X05 (0402)"#2 68.6,89.8 r0 bottom
C59_1 "100nF" "CAPC1005X05 (0402)"#2 72.3,92.1 r90 bottom
C60_1 "100nF" "CAPC1005X05 (0402)"#2 72.3,90.1 r90 bottom
C61_1 "100nF" "CAPC1005X05 (0402)"#2 69.5,91.4 r180 bottom
C62 "100nF" "CAPC1005X05 (0402)"#2 268.656,26.391 r90 top value=100pF
C63 "100nF" "CAPC1005X05 (0402)"#2 273.556,26.391 r90 top value=100pF
C64 "100nF" "CAPC1005X05 (0402)"#2 278.456,26.391 r90 top value=100pF
C65_1 "100nF" "CAPC1005X05 (0402)"#2 67.1,90.6 r0 bottom
C66_1 "100nF" "CAPC1005X05 (0402)"#2 75.9,92.2 r0 bottom
C67 "100nF" "CAPC1005X05 (0402)"#2 254.456,26.391 r90 top value=100pF
C68_1 "100nF" "CAPC1005X05 (0402)"#2 70.8,92.5 r90 bottom
C69 "100nF" "CAPC1005X05 (0402)"#2 244.656,26.391 r90 top value=100pF
C70 "100nF" "CAPC1005X05 (0402)"#2 249.556,26.391 r90 top value=100pF
C71 "100nF" "CAPC1005X05 (0402)"#2 235.356,26.391 r90 top value=100pF
C72 "100nF" "CAPC1005X05 (0402)"#2 239.856,26.391 r90 top value=100pF
C73 "100nF" "CAPC1005X05 (0402)"#2 220.756,26.391 r90 top value=100pF
C74 "100nF" "CAPC1005X05 (0402)"#2 225.556,26.391 r90 top value=100pF
C75_1 "100nF" "CAPC1005X05 (0402)"#2 68.6,86.6 r0 bottom
C76 "100nF" "CAPC1005X05 (0402)"#2 230.456,26.391 r90 top value=100pF
C77_1 "100nF" "CAPC1005X05 (0402)"#2 69.5,87.4 r180 bottom
C78_1 "100nF" "CAPC1005X05 (0402)"#2 67,91.4 r0 bottom
C79_1 "100nF" "CAPC1005X05 (0402)"#2 69.1,93.4 r270 bottom
C80_1 "100nF" "CAPC1005X05 (0402)"#2 67.5,95.1 r270 bottom
C81_1 "100nF" "CAPC1005X05 (0402)"#2 69.9,84.5 r90 bottom
C82_1 "100nF" "CAPC1005X05 (0402)"#2 73.9,91.9 r90 bottom
C83 "22uF/6.3V" "0805 (2012 metric)" 216.256,25.691 r90 top value=22uF
C84 "1uF" CAPC1608X08 211.356,25.791 r90 top
C85 "1uF" CAPC1608X08 206.456,25.791 r90 top
C86 "1uF" CAPC1608X08 201.656,25.791 r90 top
C87_1 "100nF" "CAPC1005X05 (0402)"#2 67.1,85.8 r180 bottom
C88_1 "100nF" "CAPC1005X05 (0402)"#2 68.3,84.5 r90 bottom
C89_1 "100nF" "CAPC1005X05 (0402)"#2 66.2,93 r0 bottom
C90_1 "100nF" "CAPC1005X05 (0402)"#2 65.4,93.8 r0 bottom
C91 "100nF" "CAPC1005X05 (0402)"#2 186.956,26.391 r90 top value=100pF
C92_1 "100nF" "CAPC1005X05 (0402)"#2 68.3,93.4 r270 bottom
C93 "100nF" "CAPC1005X05 (0402)"#2 191.456,26.391 r90 top value=100pF
C94_1 "100nF" "CAPC1005X05 (0402)"#2 73.6,85 r180 bottom
C95 "22uF/6.3V" "0805 (2012 metric)" 196.756,25.691 r90 top value=22uF
C96 "100nF" "CAPC1005X05 (0402)"#2 182.156,26.391 r90 top value=100pF
C97 "100nF" "CAPC1005X05 (0402)"#2 177.256,26.391 r90 top value=100pF
C98 "100nF" "CAPC1005X05 (0402)"#2 167.956,26.391 r90 top value=100pF
C99_1 "100nF" "CAPC1005X05 (0402)"#2 72.3,83.8 r90 bottom
C100 "100nF" "CAPC1005X05 (0402)"#2 203.657,65.791 r90 top value=100pF
C101 "100nF" "CAPC1005X05 (0402)"#2 209.557,65.791 r90 top value=100pF
C102 "100nF" "CAPC1005X05 (0402)"#2 156.257,26.391 r90 top value=100pF
C103 "100nF" "CAPC1005X05 (0402)"#2 162.157,26.391 r90 top value=100pF
C104 "100nF" "CAPC1005X05 (0402)"#2 193.457,65.791 r90 top value=100pF
C105 "22uF/6.3V" "0805 (2012 metric)" 188.057,65.091 r90 top value=22uF
C106_1 "10nF" "CAPC1005X05 (0402)"#2 74.7,83 r270 bottom
C107 "1uF" CAPC1608X08 177.757,65.191 r90 top
C108_1 "10nF" "CAPC1005X05 (0402)"#2 72.3,94.1 r90 bottom
C109_1 "100nF" "CAPC1005X05 (0402)"#2 75.7,89 r0 bottom
C110_1 "100nF" "CAPC1005X05 (0402)"#2 75.706,90.582 r0 bottom
C111_1 "100nF" "CAPC1005X05 (0402)"#2 75.7,87.4 r0 bottom
C112 "100nF" "CAPC1005X05 (0402)"#2 151.957,65.791 r90 top value=100pF
C113 "100nF" "CAPC1005X05 (0402)"#2 157.657,65.791 r90 top value=100pF
C114 "22uF/6.3V" "0805 (2012 metric)" 163.757,65.091 r90 top value=22uF
C119 "470pF" CAPC1608X08 14.256,104.291 r90 top
C120 "330pF" CAPC1608X08 -1.444,104.291 r90 top
C121 "1500pF" CAPC1608X08 -11.744,104.291 r90 top
C122 "10uF" CAPC1608X08 4.256,98.591 r90 top
C123 "470pF" CAPC1608X08 -6.444,98.591 r90 top
C124 "0.1uF" CAPC1608X08 5.456,109.791 r90 top
C125 "330pF" CAPC1608X08 -0.344,109.791 r90 top
C126 "470pF" CAPC1608X08 -11.144,109.791 r90 top
C127 "10uF" CAPC1608X08 7.856,78.291 r90 top
C128 "1500pF" CAPC1608X08 -12.244,78.291 r90 top
C129 "0.1uF" CAPC1608X08 16.357,84.491 r90 top
C130 "470pF" CAPC1608X08 5.557,84.491 r90 top
C131 "10uF" CAPC1608X08 -5.743,84.491 r90 top
C132 "10uF" CAPC1608X08 0.657,91.291 r90 top
C133 "0.1uF" CAPC1608X08 6.557,91.291 r90 top
C136 "10uF" CAPC1608X08 20.1,111.2 r90 top
C137 "0.1uF" CAPC1608X08 -11.643,84.491 r90 top
C138 "0.1uF" CAPC1608X08 -0.243,84.491 r90 top
C139 "10uF" CAPC1608X08 -11.043,91.291 r90 top
C140 "0.1uF" CAPC1608X08 -5.143,91.291 r90 top
C141 "10uF" CAPC1608X08 19.757,144.491 r90 top
C142 "10uF" CAPC1608X08 13.857,144.491 r90 top
C143 "10uF" CAPC1608X08 8.057,144.491 r90 top
C144 "10uF" CAPC1608X08 2.157,144.491 r90 top
C179 "100pF" CAPC1608X08 31.6,153.7 r270 bottom
C182 "100pF" CAPC1608X08 46.409,148.956 r180 top
C189 "0.1uF" CAPC1608X08 67.8,152.5 r90 bottom
C190 "100pF" CAPC1608X08 38.309,172.056 r180 top
C193 "100pF" CAPC1608X08 56.109,168.457 r180 top
C196 "100pF" CAPC1608X08 75.509,172.957 r180 top
C198 "100pF" CAPC1608X08 38.9,151.9 r90 bottom
J2 "Pad traversant" Pad 169.557,65.791 r0 top
L1 "FB0805/600R/2A" IND2012X8 173.056,26.591 r0 top
L2 "FB0805/600R/2A" IND2012X8 199.557,65.991 r0 top
L3 "FB0805/600R/2A" IND2012X8 183.457,65.991 r0 top
Q1 "OSC0/24MHz" SON440P360X120-4N 15.4,50.3 r0 top
Q2 "OSC1/32,768KHz" SON550P380X250-4N 8.5,50.4 r0 top value=32,768KHz
Q3 "NPN" SOT95P234X111-3N 14.9,39.9 r90 top
Q4 "PNP" SOT95P234X111-3N 7.6,40 r90 top
R3 "Res2" RESC1608X05 198.956,13.491 r0 top value=10k
R4 "2.2K 1%" RESC1608X05 185.056,13.491 r0 top value=1K
R5 "2.2K 1%" RESC1608X05 171.256,13.491 r0 top value=1K
R6 "Res1" RESC1608X05 193.557,52.891 r0 top value=0
R7 "Res1" RESC1608X05 189.357,52.891 r0 top value=10k
R8 "Res1" RESC1608X05 185.157,52.891 r0 top value=0
R9 "Res1" RESC1608X05 181.057,52.891 r0 top value=10k
R10 "Res1" RESC1608X05 175.457,51.991 r90 top value=10k
R11 "240 1%" RESC1608X05 172.057,52.891 r0 top value=1K
R12 "10K" RESC1608X05 166.557,51.991 r90 top value=1K
R13 "10K" RESC1608X05 161.857,51.991 r90 top value=1K
R14 "49.9R 1%" RESC1608X05 152.257,51.991 r90 top value=1K
R15 "10K" RESC1608X05 172.957,65.191 r90 top value=1K
R16 "Res1" RESC1608X05 268.556,-5.209 r90 top value=1.2k
R17 "Res1" RESC1608X05 258.256,-5.209 r90 top value=0
R18 "Res1" RESC1608X05 247.856,-5.209 r90 top value=DNI
R20 "Res1" RESC1608X05 170.656,-5.209 r90 top value=DNI
R21 "Res1" RESC1608X05 176.456,-4.409 r0 top value=DNI
R22 "Res1" RESC1608X05 180.056,-5.209 r90 top value=100K
R23 "Res1" RESC1608X05 184.956,-5.209 r90 top value=DNI
R24 "Res1" RESC1608X05 189.756,-5.209 r90 top value=DNI
R25 "Res1" RESC1608X05 194.656,-5.209 r90 top value=DNI
R26 "Res1" RESC1608X05 199.556,-5.209 r90 top value=DNI
R27 "Res1" RESC1608X05 204.456,-5.209 r90 top value=DNI
R28 "Res1" RESC1608X05 209.256,-5.209 r90 top value=DNI
R29 "Res1" RESC1608X05 214.156,-5.209 r90 top value=100K
R30 "Res1" RESC1608X05 219.056,-5.209 r90 top value=DNI
R31 "Res1" RESC1608X05 224.756,-4.409 r0 top value=DNI
R32 "Res1" RESC1608X05 228.356,-5.209 r90 top value=DNI
R33 "Res1" RESC1608X05 233.256,-5.209 r90 top value=DNI
R34 "Res1" RESC1608X05 238.156,-5.209 r90 top value=100K
R35 "Res1" RESC1608X05 243.056,-5.209 r90 top value=DNI
R36 "Res1" RESC1608X05 152.257,34.191 r90 top value=100K
R37 "Res1" RESC1608X05 157.157,34.191 r90 top value=100K
R38 "Res1" RESC1608X05 162.057,34.191 r90 top value=DNI
R39 "Res1" RESC1608X05 166.957,34.191 r90 top value=100K
R40 "Res1" RESC1608X05 171.757,34.191 r90 top value=100K
R41 "Res1" RESC1608X05 177.557,34.991 r0 top value=100K
R42 "Res1" RESC1608X05 181.157,34.191 r90 top value=100K
R43 "Res1" RESC1608X05 186.057,34.191 r90 top value=100K
R44 "Res1" RESC1608X05 190.857,34.191 r90 top value=100K
R45 "Res1" RESC1608X05 195.757,34.191 r90 top value=DNI
R46 "Res1" RESC1608X05 200.657,34.191 r90 top value=100K
R47 "Res1" RESC1608X05 205.557,34.191 r90 top value=100K
R48 "Res1" RESC1608X05 210.357,34.191 r90 top value=100K
R49 "Res1" RESC1608X05 156.457,-5.209 r90 top value=100K
R50 "Res1" RESC1608X05 161.357,-5.209 r90 top value=DNI
R51 "Res1" RESC1608X05 167.056,-4.409 r0 top value=100K
R56 "7.5k" RESC1608X05 19.856,104.191 r90 top
R57 "10k" RESC1608X05 4.456,104.191 r90 top
R58 "820" RESC1608X05 9.256,104.191 r90 top
R59 "100" RESC1608X05 -6.344,104.191 r90 top
R60 "10k" RESC1608X05 19.856,98.491 r90 top
R61 "820" RESC1608X05 15.9,110.7 r90 top
R62 "10k" RESC1608X05 14.956,98.491 r90 top
R63 "7.5k" RESC1608X05 10.156,98.491 r90 top
R64 "20k" RESC1608X05 -0.644,98.491 r90 top
R65 "1k" RESC1608X05 -11.344,98.491 r90 top
R66 "7.5k" RESC1608X05 -5.344,109.691 r90 top
R67 "10k" RESC1608X05 -16.3,97.8 r90 top
R68 "10k" RESC1608X05 13.656,78.191 r90 top
R69 "820" RESC1608X05 -16.5,83.9 r90 top
R70 "20k" RESC1608X05 2.956,78.191 r90 top
R71 "1k" RESC1608X05 -5.544,78.991 r0 top
R72 "100" RESC1608X05 -1.944,78.191 r90 top
R73 "10k" RESC1608X05 -16.4,90.7 r90 top
R74 "820" RESC1608X05 11.3,110.8 r90 top
R75 "7.5k" RESC1608X05 11.457,84.391 r90 top
R99 "10k" RESC1608X05 88.2,148.6 r270 bottom
R105 "10k" RESC1608X05 38.309,166.856 r180 top
R106 "10k" RESC1608X05 81.9,140.9 r0 bottom
R112 "220" RESC1608X05 75.509,178.357 r180 top value=220k
R116 "10k" RESC1608X05 37.9,156.9 r270 bottom
S1 "SW-SPDT" C&K_TS01ABE 129.303,129.011 r0 top locked
S2 "KMR211G-LFS" C&K_KMR211G 21.8,51 r90 top
U1 "SN74LVC1G07DCKR" DCK5 1.6,50.2 r0 top
U2 "AM3352BZCZD80" ZCZ324 72.3,89 r180 top locked
U3 "K4B4G1646D" BGA96C80P16X6_133X75X11 90.08,84.555 r0 top locked

## Footprints (in the part's own frame and the unit in brackets; to place one, negate y for a bottom-side part, rotate by r counter-clockwise, add the part's x,y. Pads: shape width x height; smd on the part's side, far side on the other; paste and mask are expansions set on the pad)
"0805 (2012 metric)" [mil] "decouplage"
  rect 45x50 smd mask+2: 1(-35.23,-0.5) 2(34.77,-0.5)
  silkscreen extent 0,-15 0,15
BGA96C80P16X6_133X75X11 [mm]
  round 0.4 smd: A1(-3.2,6) A2(-2.4,6) A3(-1.6,6) A7(1.6,6) A8(2.4,6) A9(3.2,6) B1(-3.2,5.2) B2(-2.4,5.2) B3(-1.6,5.2) B7(1.6,5.2) B8(2.4,5.2) B9(3.2,5.2) C1(-3.2,4.4) C2(-2.4,4.4) C3(-1.6,4.4) C7(1.6,4.4) C8(2.4,4.4) C9(3.2,4.4) D1(-3.2,3.6) D2(-2.4,3.6) D3(-1.6,3.6) D7(1.6,3.6) D8(2.4,3.6) D9(3.2,3.6) E1(-3.2,2.8) E2(-2.4,2.8) E3(-1.6,2.8) E7(1.6,2.8) E8(2.4,2.8) E9(3.2,2.8) F1(-3.2,2) F2(-2.4,2) F3(-1.6,2) F7(1.6,2) F8(2.4,2) F9(3.2,2) G1(-3.2,1.2) G2(-2.4,1.2) G3(-1.6,1.2) G7(1.6,1.2) G8(2.4,1.2) G9(3.2,1.2) H1(-3.2,0.4) H2(-2.4,0.4) H3(-1.6,0.4) H7(1.6,0.4) H8(2.4,0.4) H9(3.2,0.4) J1(-3.2,-0.4) J2(-2.4,-0.4) J3(-1.6,-0.4) J7(1.6,-0.4) J8(2.4,-0.4) J9(3.2,-0.4) K1(-3.2,-1.2) K2(-2.4,-1.2) K3(-1.6,-1.2) K7(1.6,-1.2) K8(2.4,-1.2) K9(3.2,-1.2) L1(-3.2,-2) L2(-2.4,-2) L3(-1.6,-2) L7(1.6,-2) L8(2.4,-2) L9(3.2,-2) M1(-3.2,-2.8) M2(-2.4,-2.8) M3(-1.6,-2.8) M7(1.6,-2.8) M8(2.4,-2.8) M9(3.2,-2.8) N1(-3.2,-3.6) N2(-2.4,-3.6) N3(-1.6,-3.6) N7(1.6,-3.6) N8(2.4,-3.6) N9(3.2,-3.6) P1(-3.2,-4.4) P2(-2.4,-4.4) P3(-1.6,-4.4) P7(1.6,-4.4) P8(2.4,-4.4) P9(3.2,-4.4) R1(-3.2,-5.2) R2(-2.4,-5.2) R3(-1.6,-5.2) R7(1.6,-5.2) R8(2.4,-5.2) R9(3.2,-5.2) T1(-3.2,-6) T2(-2.4,-6) T3(-1.6,-6) T7(1.6,-6) T8(2.4,-6) T9(3.2,-6)
  silkscreen extent -4.1,5.5 -2.6,7, body extent -3.75,-6.65 3.75,6.65, height 1.2
C&K_KMR211G [mm] "SMT_4"
  rect 2x1 smd: 1(-2.54,0.8) 2(-2.54,-0.8) 3(2.54,0.8) 4(2.54,-0.8)
  silkscreen extent -2.6,-1.78 1.65,1.82, body extent -2.07,-1.37 2.13,1.43, height 2.2
C&K_TS01ABE [mm] "Through-Hole_5"
  round 2 hole 1.1: 1(-2.54,0) 2(0,0) 3(2.54,0) ""(-2.54,5.08) ""(2.54,5.08)
  silkscreen extent -4.07,-1.17 4.06,5.59
"CAPC1005X05 (0402)"#1 [mm] "CMS_2 ; Chip Capacitor, 2-Leads, Body 1.00x0.50mm, IPC Medium Density"
  rect 0.55x0.45 smd far side mask+0.02: 1(0.508,0) 2(-0.508,0)
"CAPC1005X05 (0402)"#2 [mm] "CMS_2 ; Chip Capacitor, 2-Leads, Body 1.00x0.50mm, IPC Medium Density"
  rect 0.55x0.45 smd mask+0.02: 1(0.508,0) 2(-0.508,0)
CAPC1608X08 [mm] "CMS_2 ; Chip Capacitor, 2-Leads, Body 1.60x0.80mm, IPC Medium Density"
  rect 0.8x1 smd: 1(-0.9,0) 2(0.9,0)
  silkscreen extent -0.25,-0.55 0.25,0.55, body extent -0.8,-0.4 0.8,0.4, height 0.8
DCK5 [mm] "SC-70_5"
  rect 1.2x0.4 smd mask+0.07: 1(-1.165,0.65) 2(-1.165,0) 3(-1.165,-0.65) 4(1.165,-0.65) 5(1.165,0.65)
  silkscreen extent -1.35,-1.21 0.83,1.32, body extent -1.19,-1.08 1.19,1.08, height 1.09
IND2012X8 [mm] "ferrite 2012"
  rect 0.8x1.2 smd mask+0.051: 1(2.2,0) 2(0,0)
  silkscreen extent 0.65,-0.5 1.55,0.5
Pad [mm]
  round 1.5 smd paste-5: 1(0,0)
RESC1608X05 [mm] "CMS_2 ; Chip Resistor, 2-Leads, Body 1.60x0.80mm, IPC Medium Density"
  rect 1x1 smd: 1(-0.9,0) 2(0.9,0)
  silkscreen extent -0.18,-0.55 0.18,0.53, body extent -0.8,-0.4 0.8,0.4, height 0.45
SON440P360X120-4N [mm] "SON, 4-Leads, Body 6.00x3.60mm, Pitch 4.40mm, IPC Medium Density"
  rect 1.4x1.8 smd: 1(-1.2,2.2) 2(-1.2,-2.2) 3(1.2,-2.2) 4(1.2,2.2)
  silkscreen extent -2.9,-3.4 2.2,3.4, body extent -1.8,-3 1.8,3, height 1.2
SON550P380X250-4N [mm] "SON, 4-Leads, Body 8.70x3.80mm, Pitch 5.50mm, IPC Medium Density"
  rect 1.6x0.7 smd: 1(-1.15,2.75) 2(-1.15,-2.75) 3(1.15,-2.75) 4(1.15,2.75)
  silkscreen extent -2.7,-4.55 2.12,4.55, body extent -1.9,-4.35 1.9,4.35, height 2.5
SOT95P234X111-3N [mm] "SOT23_3 ; SOT23, 3-Leads, Body 2.92x2.34mm, Pitch 0.95mm, IPC Medium Density"
  rect 1.5x1 smd: 1(-1.393,0.95) 2(-1.393,-0.95) 3(1.393,0)
  silkscreen extent -1.3,-1.73 0.9,2, body extent -0.7,-1.52 0.7,1.52, height 1.11
ZCZ324 [mm] "BGA_324"
  round 0.45 smd paste-2 mask+0.051: A1(-6.8,6.8) A2(-6,6.8) A3(-5.2,6.8) A4(-4.4,6.8) A5(-3.6,6.8) A6(-2.8,6.8) A7(-2,6.8) A8(-1.2,6.8) A9(-0.4,6.8) A10(0.4,6.8) A11(1.2,6.8) A12(2,6.8) A13(2.8,6.8) A14(3.6,6.8) A15(4.4,6.8) A16(5.2,6.8) A17(6,6.8) A18(6.8,6.8) B1(-6.8,6) B2(-6,6) B3(-5.2,6) B4(-4.4,6) B5(-3.6,6) B6(-2.8,6) B7(-2,6) B8(-1.2,6) B9(-0.4,6) B10(0.4,6) B11(1.2,6) B12(2,6) B13(2.8,6) B14(3.6,6) B15(4.4,6) B16(5.2,6) B17(6,6) B18(6.8,6) C1(-6.8,5.2) C2(-6,5.2) C3(-5.2,5.2) C4(-4.4,5.2) C5(-3.6,5.2) C6(-2.8,5.2) C7(-2,5.2) C8(-1.2,5.2) C9(-0.4,5.2) C10(0.4,5.2) C11(1.2,5.2) C12(2,5.2) C13(2.8,5.2) C14(3.6,5.2) C15(4.4,5.2) C16(5.2,5.2) C17(6,5.2) C18(6.8,5.2) D1(-6.8,4.4) D2(-6,4.4) D3(-5.2,4.4) D4(-4.4,4.4) D5(-3.6,4.4) D6(-2.8,4.4) D7(-2,4.4) D8(-1.2,4.4) D9(-0.4,4.4) D10(0.4,4.4) D11(1.2,4.4) D12(2,4.4) D13(2.8,4.4) D14(3.6,4.4) D15(4.4,4.4) D16(5.2,4.4) D17(6,4.4) D18(6.8,4.4) E1(-6.8,3.6) E2(-6,3.6) E3(-5.2,3.6) E4(-4.4,3.6) E5(-3.6,3.6) E6(-2.8,3.6) E7(-2,3.6) E8(-1.2,3.6) E9(-0.4,3.6) E10(0.4,3.6) E11(1.2,3.6) E12(2,3.6) E13(2.8,3.6) E14(3.6,3.6) E15(4.4,3.6) E16(5.2,3.6) E17(6,3.6) E18(6.8,3.6) F1(-6.8,2.8) F2(-6,2.8) F3(-5.2,2.8) F4(-4.4,2.8) F5(-3.6,2.8) F6(-2.8,2.8) F7(-2,2.8) F8(-1.2,2.8) F9(-0.4,2.8) F10(0.4,2.8) F11(1.2,2.8) F12(2,2.8) F13(2.8,2.8) F14(3.6,2.8) F15(4.4,2.8) F16(5.2,2.8) F17(6,2.8) F18(6.8,2.8) G1(-6.8,2) G2(-6,2) G3(-5.2,2) G4(-4.4,2) G5(-3.6,2) G6(-2.8,2) G7(-2,2) G8(-1.2,2) G9(-0.4,2) G10(0.4,2) G11(1.2,2) G12(2,2) G13(2.8,2) G14(3.6,2) G15(4.4,2) G16(5.2,2) G17(6,2) G18(6.8,2) H1(-6.8,1.2) H2(-6,1.2) H3(-5.2,1.2) H4(-4.4,1.2) H5(-3.6,1.2) H6(-2.8,1.2) H7(-2,1.2) H8(-1.2,1.2) H9(-0.4,1.2) H10(0.4,1.2) H11(1.2,1.2) H12(2,1.2) H13(2.8,1.2) H14(3.6,1.2) H15(4.4,1.2) H16(5.2,1.2) H17(6,1.2) H18(6.8,1.2) J1(-6.8,0.4) J2(-6,0.4) J3(-5.2,0.4) J4(-4.4,0.4) J5(-3.6,0.4) J6(-2.8,0.4) J7(-2,0.4) J8(-1.2,0.4) J9(-0.4,0.4) J10(0.4,0.4) J11(1.2,0.4) J12(2,0.4) J13(2.8,0.4) J14(3.6,0.4) J15(4.4,0.4) J16(5.2,0.4) J17(6,0.4) J18(6.8,0.4) K1(-6.8,-0.4) K2(-6,-0.4) K3(-5.2,-0.4) K4(-4.4,-0.4) K5(-3.6,-0.4) K6(-2.8,-0.4) K7(-2,-0.4) K8(-1.2,-0.4) K9(-0.4,-0.4) K10(0.4,-0.4) K11(1.2,-0.4) K12(2,-0.4) K13(2.8,-0.4) K14(3.6,-0.4) K15(4.4,-0.4) K16(5.2,-0.4) K17(6,-0.4) K18(6.8,-0.4) L1(-6.8,-1.2) L2(-6,-1.2) L3(-5.2,-1.2) L4(-4.4,-1.2) L5(-3.6,-1.2) L6(-2.8,-1.2) L7(-2,-1.2) L8(-1.2,-1.2) L9(-0.4,-1.2) L10(0.4,-1.2) L11(1.2,-1.2) L12(2,-1.2) L13(2.8,-1.2) L14(3.6,-1.2) L15(4.4,-1.2) L16(5.2,-1.2) L17(6,-1.2) L18(6.8,-1.2) M1(-6.8,-2) M2(-6,-2) M3(-5.2,-2) M4(-4.4,-2) M5(-3.6,-2) M6(-2.8,-2) M7(-2,-2) M8(-1.2,-2) M9(-0.4,-2) M10(0.4,-2) M11(1.2,-2) M12(2,-2) M13(2.8,-2) M14(3.6,-2) M15(4.4,-2) M16(5.2,-2) M17(6,-2) M18(6.8,-2) N1(-6.8,-2.8) N2(-6,-2.8) N3(-5.2,-2.8) N4(-4.4,-2.8) N5(-3.6,-2.8) N6(-2.8,-2.8) N7(-2,-2.8) N8(-1.2,-2.8) N9(-0.4,-2.8) N10(0.4,-2.8) N11(1.2,-2.8) N12(2,-2.8) N13(2.8,-2.8) N14(3.6,-2.8) N15(4.4,-2.8) N16(5.2,-2.8) N17(6,-2.8) N18(6.8,-2.8) P1(-6.8,-3.6) P2(-6,-3.6) P3(-5.2,-3.6) P4(-4.4,-3.6) P5(-3.6,-3.6) P6(-2.8,-3.6) P7(-2,-3.6) P8(-1.2,-3.6) P9(-0.4,-3.6) P10(0.4,-3.6) P11(1.2,-3.6) P12(2,-3.6) P13(2.8,-3.6) P14(3.6,-3.6) P15(4.4,-3.6) P16(5.2,-3.6) P17(6,-3.6) P18(6.8,-3.6) R1(-6.8,-4.4) R2(-6,-4.4) R3(-5.2,-4.4) R4(-4.4,-4.4) R5(-3.6,-4.4) R6(-2.8,-4.4) R7(-2,-4.4) R8(-1.2,-4.4) R9(-0.4,-4.4) R10(0.4,-4.4) R11(1.2,-4.4) R12(2,-4.4) R13(2.8,-4.4) R14(3.6,-4.4) R15(4.4,-4.4) R16(5.2,-4.4) R17(6,-4.4) R18(6.8,-4.4) T1(-6.8,-5.2) T2(-6,-5.2) T3(-5.2,-5.2) T4(-4.4,-5.2) T5(-3.6,-5.2) T6(-2.8,-5.2) T7(-2,-5.2) T8(-1.2,-5.2) T9(-0.4,-5.2) T10(0.4,-5.2) T11(1.2,-5.2) T12(2,-5.2) T13(2.8,-5.2) T14(3.6,-5.2) T15(4.4,-5.2) T16(5.2,-5.2) T17(6,-5.2) T18(6.8,-5.2) U1(-6.8,-6) U2(-6,-6) U3(-5.2,-6) U4(-4.4,-6) U5(-3.6,-6) U6(-2.8,-6) U7(-2,-6) U8(-1.2,-6) U9(-0.4,-6) U10(0.4,-6) U11(1.2,-6) U12(2,-6) U13(2.8,-6) U14(3.6,-6) U15(4.4,-6) U16(5.2,-6) U17(6,-6) U18(6.8,-6) V1(-6.8,-6.8) V2(-6,-6.8) V3(-5.2,-6.8) V4(-4.4,-6.8) V5(-3.6,-6.8) V6(-2.8,-6.8) V7(-2,-6.8) V8(-1.2,-6.8) V9(-0.4,-6.8) V10(0.4,-6.8) V11(1.2,-6.8) V12(2,-6.8) V13(2.8,-6.8) V14(3.6,-6.8) V15(4.4,-6.8) V16(5.2,-6.8) V17(6,-6.8) V18(6.8,-6.8)
  silkscreen extent -8.8,-7.87 7.87,7.87, body extent -7.54,-7.54 7.54,7.54, height 1.4

## Part data
C13 C43 C44 C45 C46 C84 C85 C86 C107: library part Cap, "Capacitor", Case="0603 [1608 Metric]", Fabricant=MURATA, Fournisseur=Farnell
  C13 C84 C85 C86 C107: DataSheet=http://www.farnell.com/datasheets/2048127.pdf, RefFabricant=GRM188R60J105KA01D, RefFournisseur=9527699
  C43 C44 C45 C46: DataSheet=http://www.farnell.com/datasheets/2165937.pdf, RefFabricant=GRT1885C1H102JA02D, RefFournisseur=2672134
C14 C15 C16 C17 C18 C19 C20 C21 C22 C23 C24 C25 C26 C27 C28 C29 C30 C31 C32 C33 C34 C35 C36 C37 C38 C42 C47 C48 C54 C62 C63 C64 C67 C69 C70 C71 C72 C73 C74 C76 C91 C93 C96 C97 C98 C100 C101 C102 C103 C104 C112 C113: library part Cap, "Capacitor", Case="0402 [1005 Metric]", Fabricant=MURATA, Fournisseur=Farnell
  C14 C16 C17 C20 C21 C23 C24 C25 C26 C27 C28 C29 C30 C31 C32 C33 C34 C35 C36 C37 C38 C42 C48 C54 C62 C63 C64 C67 C69 C70 C71 C72 C73 C74 C76 C91 C93 C96 C97 C98 C100 C101 C102 C103 C104 C112 C113: DataSheet=http://www.farnell.com/datasheets/2048172.pdf, RefFabricant=GRM155R61A104JA01D, RefFournisseur=2470461
  C15 C18: DataSheet=http://www.farnell.com/datasheets/2048029.pdf, RefFabricant=GRM1555C1H180FA01D, RefFournisseur=2611892
  C19 C22: DataSheet=http://www.farnell.com/datasheets/2079135.pdf, RefFabricant=GRM1555C1H120GA01D, RefFournisseur=2611891
  C47: DataSheet=http://www.farnell.com/datasheets/2048220.pdf, RefFabricant=GRM155R71E103JA01D, RefFournisseur=2470469
C29_1 C49_1 C50_1 C52_1 C53_1 C55_1 C56_1 C57_1 C58_1 C59_1 C60_1 C61_1 C65_1 C66_1 C68_1 C75_1 C77_1 C78_1 C79_1 C80_1 C81_1 C82_1 C87_1 C88_1 C89_1 C90_1 C92_1 C94_1 C99_1 C106_1 C108_1 C109_1 C110_1 C111_1: library part Cap, "Capacitor"
C51 C83 C95 C105 C114: library part Cap, "Capacitor", Case="0805 (2012 metric)", DataSheet=http://www.farnell.com/datasheets/2291921.pdf, Fabricant=TDK, Fournisseur=Farnell, RefFabricant=C2012X5R0J226K125AB, RefFournisseur=2525125
C119 C120 C121 C122 C123 C125 C126 C127 C128 C130 C131 C132 C136 C139 C141 C142 C143 C144 C179 C182 C189 C190 C193 C196 C198: library part "Cap Semi", "Capacitor (Semiconductor SIM Model)", Case="0603 [1608 Metric]", Fabricant=MURATA, Fournisseur=Farnell
  C119 C120 C121 C122 C123 C125 C126 C127 C128 C130 C131 C132 C136 C139 C141 C142 C143 C144: DataSheet=http://www.farnell.com/datasheets/2079165.pdf, RefFabricant=GRM188R60J106ME47J, RefFournisseur=2611921
  C179 C182 C190 C193 C196 C198: DataSheet=http://www.farnell.com/datasheets/2165936.pdf, RefFabricant=GRT1885C1H101JA02D, RefFournisseur=2672133
  C189: DataSheet=http://www.farnell.com/datasheets/2048672.pdf, RefFabricant=GRM188F51E104ZA01D, RefFournisseur=2821272
C124 C129 C133 C137 C138 C140: library part "Cap Semi", "Capacitor", Case="0603 [1608 Metric]", DataSheet=http://www.farnell.com/datasheets/2048127.pdf, Fabricant=MURATA, Fournisseur=Farnell, RefFabricant=GRM188R60J105KA01D, RefFournisseur=9527699
J2: library part Pad
L1 L2 L3: library part Inductor, Case="0805 (2012 metric)", DataSheet=http://www.farnell.com/datasheets/84904.pdf, Fabricant=TDK, Fournisseur=Farnell, RefFabricant=MPZ2012S601A, RefFournisseur=1669753
Q1: library part CRYS_32_768KHz_CMS32, DataSheet=http://www.farnell.com/datasheets/1750519.pdf, Fabricant=ABRACON, Fournisseur=Farnell, RefFabricant=ABMM2-24.000MHZ-E2-T, RefFournisseur=2467855
Q2: library part XTAL, "Crystal Oscillator", DataSheet=http://www.farnell.com/datasheets/2175893.pdf, Fabricant="IQD FREQUENCY PRODUCTS", Fournisseur=Farnell, RefFabricant=LFXTAL003000, RefFournisseur=9713220
Q3: "NPN Bipolar Transistor", DataSheet=http://www.farnell.com/datasheets/1813846.pdf, Fabricant="ON SEMICONDUCTOR", Fournisseur=Farnell, RefFabricant=SMMUN2214LT1G, RefFournisseur=9556672
Q4: "PNP Bipolar Transistor", DataSheet=http://www.farnell.com/datasheets/2237089.pdf, Fabricant="ON SEMICONDUCTOR", Fournisseur=Farnell, RefFabricant=SMMUN2114LT1G, RefFournisseur=2724481
R3 R6 R7 R8 R9 R10 R16 R17 R18 R20 R21 R22 R23 R24 R25 R26 R27 R28 R29 R30 R31 R32 R33 R34 R35 R36 R37 R38 R39 R40 R41 R42 R43 R44 R45 R46 R47 R48 R49 R50 R51: "Resistor", Case="0603 [1608 Metric]"
  R3 R7 R9 R10: DataSheet=http://www.farnell.com/datasheets/1935020.pdf, Fabricant="TE CONNECTIVITY", Fournisseur=Farnell, RefFabricant=CPF-A-0603B4K7E1, RefFournisseur=2483933
  R16: DataSheet=http://www.farnell.com/datasheets/1935020.pdf, Fabricant="TE CONNECTIVITY", Fournisseur=Farnell, RefFabricant=CPF-A-0603B1K2E1, RefFournisseur=2483896
  R22 R29 R34 R36 R37 R39 R40 R41 R42 R43 R44 R46 R47 R48 R49 R51: DataSheet=http://www.farnell.com/datasheets/2189072.pdf, Fabricant="TE CONNECTIVITY", Fournisseur=Farnell, RefFabricant=RN73C1J100KBTDF, RefFournisseur=2687850
R4 R5 R11 R12 R13 R14 R15: library part Res2, "Resistor", Case="0603 [1608 Metric]", DataSheet=http://www.farnell.com/datasheets/1935020.pdf, Fabricant="TE CONNECTIVITY", Fournisseur=Farnell, RefFabricant=CPF-A-0603B1K0E1, RefFournisseur=2483880
R56 R57 R58 R59 R60 R61 R62 R63 R64 R65 R66 R67 R68 R69 R70 R71 R72 R73 R74 R75 R99 R105 R106 R112 R116: library part Res3, "Resistor", Case="0603 [1608 Metric]", Fabricant="TE CONNECTIVITY", Fournisseur=Farnell
  R56 R57 R58 R59 R60 R61 R62 R63 R64 R65 R66 R67 R68 R69 R70 R71 R72 R73 R74 R75: DataSheet=http://www.farnell.com/datasheets/2043336.pdf, RefFabricant=CPF0603B3K0E1, RefFournisseur=2331191
  R99 R105 R106 R116: DataSheet=http://www.farnell.com/datasheets/1935020.pdf, RefFabricant=CPF-A-0603B4K7E1, RefFournisseur=2483933
  R112: DataSheet=http://www.farnell.com/datasheets/1935020.pdf, RefFabricant=CPF-A-0603B220KE1, RefFournisseur=2483903
S1: "SPDT Subminiature Toggle Switch, Right Angle Mounting, Vertical Actuation", Case=Through-Hole_5, DataSheet=http://www.farnell.com/datasheets/1839865.pdf, Fabricant="C & K COMPONENTS", Fournisseur=Farnell, RefFabricant=TS01ABE, RefFournisseur=2435185
S2: "Commutateur tactile", DataSheet=http://www.farnell.com/datasheets/2044619.pdf, Fabricant="C & K COMPONENTS", Fournisseur=Farnell, RefFabricant="KMR211G LFS", RefFournisseur=1437635
U1: "Buffers & Transmetteurs", DataSheet=http://www.ti.com/lit/ds/symlink/sn74lvc1g07.pdf, Fabricant="Texas Instrument", Fournisseur=Farnell, RefFabricant=SN74LVC1G07DCKR, RefFournisseur=1287544
U2: "Microprocesseur ARM", DataSheet=http://www.ti.com/lit/ds/symlink/am3352.pdf, Fabricant="Texas Instrument", Fournisseur=OLIMEX, RefFabricant=AM3352ZCZD72, RefFournisseur=AM3352ZCZD72
U3: "Mémoire DDR3/SRAM", DataSheet=http://www.samsung.com/global/business/semiconductor/file/product/DS_K4B4G1646D-BC_I_P_Rev102.pdf, Fabricant=Samsung, Fournisseur=Olimex, RefFabricant=DS_K4B4G1646D, RefFournisseur=K4B4G1646D-BCK0

## Via types
v1: diameter 0.4, hole 0.2, Top Layer (Sig 1) to Bottom Layer (Sig 4), 217 vias
v2: diameter 0.4, hole 0.2, Top Layer (Sig 1) to Bottom Layer (Sig 4), tented bottom, 77 vias
v3: diameter 0.457, hole 0.203, Top Layer (Sig 1) to Bottom Layer (Sig 4), tented both sides, 11 vias
v4: diameter 0.4, hole 0.2, Top Layer (Sig 1) to Bottom Layer (Sig 4), tented both sides, 2 vias
v5: diameter 0.2, hole 0.1, Top Layer (Sig 1) to Bottom Layer (Sig 4), 1 vias

## Nets (pads, with @x,y where several pads share a name; then routed paths per layer and width w, separated by ;. In a path a pad name is that pad's centre, name@x,y a point inside that pad or via, vN(x,y) a via of type N, cw(c..) or ccw(c..) an arc to the next point about the centre after c; other vN are vias at no path point)
#CAS: U2.F1 U3.K3 | length 24
  Top Layer (Sig 1) w0.284: U2.F1@79.1,86.2 81.063,86.201 81.317,85.947 81.317,85.191 81.952,84.556 82.46,84.556 82.587,84.429 82.587,79.603 82.714,79.476 83.095,79.476 83.222,79.603 83.222,81 83.349,81.127 84.003,81.127 84.13,81 84.13,79.73 84.257,79.603 84.746,79.603 84.873,79.73 84.873,79.984 84.746,80.111 84.619,80.111 84.492,80.238 84.492,80.492 84.619,80.619 84.746,80.619 84.873,80.746 84.873,81.254 84.746,81.381 83.857,81.381 83.73,81.508 v3(83.73,82.27) ; v3(88.08,82.955) U3.K3@88.48,83.355
  Signal Layer 3 w0.234: v3(83.73,82.27) 85.635,82.27 85.889,82.524 87.648,82.524 v3(88.08,82.955)
#CS: U2.H2 U3.L2 | length 23.9
  Top Layer (Sig 1) w0.284: U2.H2@78.3,87.8 78.7,88.201 81.228,88.201 83.286,86.143 84.429,86.143 86.016,84.555 86.016,83.235 85.94,83.158 85.457,83.158 85.381,83.082 85.381,81.882 85.629,81.634 85.629,78.205 85.756,78.078 85.889,78.078 86.016,78.205 86.016,81.761 85.762,82.015 85.762,82.574 85.838,82.65 86.067,82.65 86.143,82.574 86.143,82.228 86.219,82.152 87.277,82.152 U3.L2@87.68,82.555
#RAS: U2.G4 U3.J3 | length 24
  Top Layer (Sig 1) w0.25: U2.G4@76.7,87 v1(77.1,86.6) ; v2(88.08,83.755) U3.J3@88.48,84.155
  Signal Layer 3 w0.234: v1@77.101,86.6 76.701,86.2 76.701,85.616 76.916,85.4 77.297,85.4 77.501,85.197 77.501,84.81 77.755,84.556 80.809,84.556 81.317,85.064 81.317,85.699 80.822,86.194 80.047,86.194 79.92,86.321 79.92,87.223 80.047,87.35 81.571,87.35 83.076,85.845 84.346,85.845 86.004,84.187 87.934,84.187 88.175,84.429 88.683,84.429 89.419,83.693 89.419,83.513 89.271,83.366 89.092,83.366 88.702,83.755 v2(88.08,83.755)
#RESET: R12.1 U2.G2 U3.T2 | length 18.1
  Top Layer (Sig 1) w0.284: U2.G2@78.3,87 78.701,87.402 81.012,87.402 82.079,86.334 82.079,85.572 82.333,85.318 82.968,85.318 83.33,84.956 84.473,84.956 85,84.429 85,81.762 85.254,81.508 85.254,77.825 85.381,77.698 86.823,77.698 U3.T2@87.68,78.555
#WE: U2.B2 U3.L3 | length 23.9
  Top Layer (Sig 1) w0.25: v2(88.08,82.155) U3.L3@88.479,82.555
  Top Layer (Sig 1) w0.284: U2.B2@78.3,83 78.3,82.761 78.697,82.364 78.697,80.745 78.824,80.618 79.539,80.618 80.047,80.11 80.047,79.221 v2(81.952,77.316)
  Signal Layer 3 w0.234: v2@81.952,77.317 81.958,77.31 82.212,77.31 83.349,76.174 88.81,76.174 89.699,77.063 89.699,80.365 90.08,80.746 90.08,81.508 89.064,82.524 88.448,82.524 v2(88.08,82.155)
+1.1V_CORE: C51.2 C52_1.1 C53_1.1 C54.1 C55_1.1 C56_1.1 C57_1.1 C58_1.1 C59_1.1 C60_1.1 C61_1.1 C62.1 C63.1 C64.1 U2.F6 U2.F7 U2.G6 U2.G7 U2.G10 U2.H11 U2.J12 U2.K6 U2.K8 U2.K12 U2.L6 U2.L7 U2.L8 U2.L9 U2.M11 U2.M13 U2.N8 U2.N9 U2.N12 U2.N13 | length 18.3
  Top Layer (Sig 1) w0.25: v1(69.1,90.6) U2.M13@69.5,91 ; U2.N13@69.5,91.8 v1(69.9,92.2) U2.N12@70.3,91.8 ; v1(69.9,88.2) U2.J12@70.3,88.6 ; v1(69.9,89.8) U2.K12@70.3,89.4 ; U2.H11@71.1,87.8 v1(71.5,87.4) U2.G10@71.9,87 ; U2.M11@71.1,91 v1(71.5,91.4) ; U2.L9@72.7,90.2 v1(73.1,90.6) U2.L8@73.5,90.2 ; U2.N9@72.7,91.8 v1(73.1,92.2) U2.N8@73.5,91.8 ; U2.K8@73.5,89.4 v1(73.9,89.8) U2.L7@74.3,90.2 ; U2.F7@74.3,86.2 v1(74.7,86.6) U2.G7@74.3,87 ; U2.F6@75.1,86.2 v1(75.5,86.6) U2.G6@75.1,87 ; U2.K6@75.1,89.4 v1(75.5,89.8) U2.L6@75.1,90.2
  Bottom Layer (Sig 4) w0.25: C61_1.1@68.892,91.4 69.1,91.192 v1(69.1,90.6) ; C58_1.1@69.108,89.8 v1(69.9,89.8) ; C57_1.1@69.892,89 69.892,88.208 v1(69.9,88.2) ; v1(69.9,92.2) v1@69.908,92.192 ; v1(71.5,87.4) 72.208,87.4 C52_1.1@72.3,87.492 ; C60_1.1@72.3,90.608 72.308,90.6 v1(73.1,90.6) ; C59_1.1@72.3,92.608 72.708,92.2 v1(73.1,92.2) ; v1(73.9,89.8) 74.116,89.584 C56_1.1@74.116,89 ; C55_1.1@74.208,87.4 74.208,87.092 v1(74.7,86.6)
+1.1V_MPU: C73.1 C74.1 C75_1.1 C76.1 C77_1.1 U2.A2 U2.F10 U2.F11 U2.F12 U2.F13 U2.G13 U2.H13 U2.J13 | length 5.6
  Top Layer (Sig 1) w0.25: v1(69.1,85.8) U2.F13@69.5,86.2 ; U2.G13@69.5,87 v1(69.9,86.6) U2.F12@70.3,86.2 ; U2.H13@69.5,87.8 v1(69.1,88.2) U2.J13@69.5,88.6 ; U2.F11@71.1,86.2 v1(71.5,85.8) U2.F10@71.9,86.2
  Bottom Layer (Sig 4) w0.25: C77_1.1@68.992,87.4 68.992,88.092 v1(69.1,88.2) ; v1(69.1,85.8) 69.108,85.808 C75_1.1@69.108,86.6
+1.5V_DDR: C14.2 C20.1 C21.1 C23.1 C24.1 C25.1 C26.1 C27.1 C28.1 C29.1 C29_1.1 C30.1 C31.1 C32.1 C33.1 C34.1 C35.1 C36.1 C37.1 C38.1 C109_1.1 C110_1.1 C111_1.1 C112.1 C113.1 C114.2 R4.2 R12.2 U2.E5 U2.F5 U2.G5 U2.H5 U2.J5 U2.K5 U2.L5 U3.A1 U3.A8 U3.B2 U3.C1 U3.C9 U3.D2 U3.D9 U3.E9 U3.F1 U3.G7 U3.H2 U3.H9 U3.K2 U3.K8 U3.N1 U3.N9 U3.R1 U3.R9 | length 23.7
  Top Layer (Sig 1) w0.25: U2.E5@75.9,85.4 v1(76.3,85.8) ; U2.F5@75.9,86.2 v1(76.3,86.6) U2.G5@75.9,87 ; U2.H5@75.9,87.8 76.2,88.1 v1(76.2,88.2) 76.2,88.3 U2.J5@75.9,88.6 ; U2.K5@75.9,89.4 v1(76.3,89.8) U2.L5@75.9,90.2 ; v2(86.48,78.955) U3.R1@86.879,79.355 ; v2(86.48,80.555) U3.N1@86.879,80.955 ; v2(86.481,86.928) 86.507,86.928 U3.F1@86.88,86.555 ; v2(86.48,89.355) U3.C1@86.88,88.955 ; v2(86.48,90.955) U3.A1@86.88,90.555 ; v2(87.28,82.955) U3.K2@87.679,83.355 ; v2(87.28,85.355) U3.H2@87.68,84.955 ; v2(87.28,90.155) U3.B2@87.68,89.755 ; U3.D2@87.68,88.155 v2(88.08,87.755) ; U3.G7@91.68,85.755 v2(92.08,86.155) ; U3.K8@92.48,83.355 v2(92.88,82.955) ; U3.A8@92.48,90.555 v2(92.88,90.955) ; U3.R9@93.28,79.355 v2(93.68,78.955) ; U3.N9@93.28,80.955 v2(93.68,80.555) ; U3.H9@93.28,84.955 v2(93.68,85.355) ; U3.E9@93.28,87.355 v2(93.68,87.755) ; U3.D9@93.28,88.155 v2(93.68,88.555) ; U3.C9@93.28,88.955 v2(93.68,89.355)
  Bottom Layer (Sig 4) w0.15: v2(93.68,78.955) v2@93.729,78.906 ; C27.1@94.463,85.355 C27.1@94.466,85.352
  Bottom Layer (Sig 4) w0.25: v1@76.2,89.7 v1(76.2,88.2) 76.208,88.192 C111_1.1@76.208,87.4 76.3,87.308 v1(76.3,86.6) v1(76.3,85.8) 76.3,85.108 C29_1.1@76.408,85 ; v1@76.292,89.808 v1(76.3,89.8) ; v2(92.88,82.955) 93.595,82.24 C38.1@93.874,82.24 ; v2(93.68,80.555) 93.897,80.772 C31.1@94.432,80.772 ; v2(93.68,85.355) C27.1@94.463,85.355 ; v2(93.68,87.755) C25.1@94.277,87.755 ; v2(93.68,89.355) C28.1@94.29,89.355 ; v2@93.729,78.906 C34.1@94.432,78.906
+1.8V_PMIC: C88_1.1 C89_1.1 C90_1.1 C91.1 C92_1.1 C93.1 C94_1.1 C95.2 C96.2 C98.2 C108_1.2 L1.2 L2.1 U2.E6 U2.E14 U2.F9 U2.K13 U2.N6 U2.N16 U2.P9 U2.P14 U2.R11 U2.R16 | length 10.6
  Top Layer (Sig 1) w0.25: v1(66.7,92.2) U2.N16@67.1,91.8 ; v1(66.7,93.8) U2.R16@67.1,93.4 ; v1(68.3,92.2) U2.P14@68.7,92.6 ; U2.E14@68.7,85.4 v1(69.1,85) ; v1(69.1,89) U2.K13@69.5,89.4 ; v1(70.7,93.8) U2.R11@71.1,93.4 ; U2.F9@72.7,86.2 v1(73.1,85.8) ; U2.P9@72.7,92.6 v1(73.1,93) ; U2.E6@75.1,85.4 v1(75.5,85.8) ; U2.N6@75.1,91.8 v1(75.5,91.4)
  Bottom Layer (Sig 4) w0.25: C90_1.1@65.908,93.8 v1(66.7,93.8) ; v1(66.7,92.2) 66.708,92.208 C89_1.1@66.708,93 ; C88_1.1@68.3,85.008 69.092,85.008 v1(69.1,85) ; v1(68.3,92.2) C92_1.1@68.3,92.892 ; C108_1.2@72.3,93.592 72.508,93.592 v1(73.1,93) ; C94_1.1@73.092,85 73.092,85.792 v1(73.1,85.8)
+1.8V_VLDO1: C106_1.2 U1.5 U2.D7 | length 1.3
  Top Layer (Sig 1) w0.25: U2.D7@74.3,84.6 v1(74.7,84.2)
  Bottom Layer (Sig 4) w0.25: C106_1.2@74.7,83.508 v1(74.7,84.2)
+3.3V_CORE: C49_1.1 C50_1.1 C65_1.1 C66_1.1 C67.1 C68_1.1 C69.1 C70.1 C71.1 C72.1 C78_1.1 C79_1.1 C80_1.1 C81_1.1 C82_1.1 C83.2 C87_1.2 C97.2 Q3.2 R3.2 R7.1 R8.2 R9.1 R10.1 R20.2 R21.2 R22.2 R23.2 R24.2 R25.2 R26.2 R27.2 R28.2 R29.2 R30.2 R31.2 R32.2 R33.2 R34.2 R35.2 U2.E10 U2.E11 U2.E12 U2.E13 U2.F14 U2.G14 U2.H14 U2.J14 U2.K14 U2.L14 U2.N5 U2.N15 U2.P5 U2.P6 U2.P7 U2.P8 U2.P10 U2.P11 U2.P12 U2.P13 U2.R15 | length 20.4
  Top Layer (Sig 1) w0.25: v1(67.5,92.2) U2.N15@67.9,91.8 ; v1(67.5,93.8) U2.R15@67.9,93.4 ; v1(68.3,85.8) U2.F14@68.7,86.2 ; v1(68.3,88.2) U2.J14@68.7,88.6 ; v1(68.3,89) U2.K14@68.7,89.4 ; v1(68.3,90.6) U2.L14@68.7,90.2 ; U2.G14@68.7,87 v1(68.3,87.4) U2.H14@68.7,87.8 ; v1(69.1,92.2) U2.P13@69.5,92.6 ; U2.E13@69.5,85.375 U2.E13@69.5,85.4 v1(69.9,85.8) 70.275,85.425 70.275,85.375 U2.E12@70.3,85.4 ; v1(69.9,93) U2.P12@70.3,92.6 ; U2.E11@71.1,85.4 v1(71.5,85) U2.E10@71.9,85.4 ; U2.P11@71.1,92.6 v1(71.5,93) U2.P10@71.9,92.6 ; U2.P8@73.5,92.6 v1(73.9,93) ; U2.P7@74.3,92.6 v1(74.7,93) ; U2.P6@75.1,92.6 v1(75.5,93) ; U2.N5@75.9,91.8 v1(76.3,91.4) ; U2.P5@75.9,92.6 v1(76.3,93)
  Bottom Layer (Sig 4) w0.25: v1(67.5,92.2) 67.508,92.192 C78_1.1@67.508,91.4 ; v1(67.5,93.8) C80_1.1@67.5,94.592 ; C87_1.2@67.608,85.8 v1(68.3,85.8) ; C65_1.1@67.608,90.6 v1(68.3,90.6) ; v1(69.1,92.2) C79_1.1@69.1,92.892 ; C81_1.1@69.9,85.008 v1(69.9,85.8) ; v1(69.9,93) 69.908,93.008 C68_1.1@70.7,93.008 ; C50_1.1@70.7,84.992 71.492,84.992 v1(71.5,85) 72.084,85.584 C49_1.1@72.3,85.584 ; C82_1.1@73.9,92.508 v1(73.9,93) ; v1(76.3,91.4) 76.408,91.508 C66_1.1@76.408,92.2
+3.3V_VLDO2: 
+3.3VA: 
+5V: 
+5VA: C131.1 C136.1 C137.2 C138.2
-5V: C139.2 C140.1 C189.2
A0: U2.F3 U3.N3 | length 23.9
  Top Layer (Sig 1) w0.25: U2.F3@77.5,86.2 v1(77.9,85.8) ; v2(88.08,80.555) U3.N3@88.479,80.955
  Signal Layer 3 w0.234: v1(80.428,82.905) 79.92,82.905 79.793,82.778 79.793,81 81.444,79.349 81.444,79.095 83.603,76.936 88.175,76.936 88.937,77.698 88.937,80.492 88.556,80.873 88.397,80.873 v2(88.08,80.555)
  Bottom Layer (Sig 4) w0.284: v1@77.901,85.801 78.307,86.207 78.904,86.207 79.158,85.953 79.158,84.175 v1(80.428,82.905)